# Altium PCB TR8253-EVB-PDI-1_0.PcbDoc
Units mm, origin at the board's own origin, x right, y up, seen from the top; angles counter-clockwise.
Board outline 60 x 60 mm, 4 copper layers (Top Layer, GND, POW, Bottom Layer), stack 1.58 mm thick; 103 components, 107 nets, 394 pads, 293 vias.
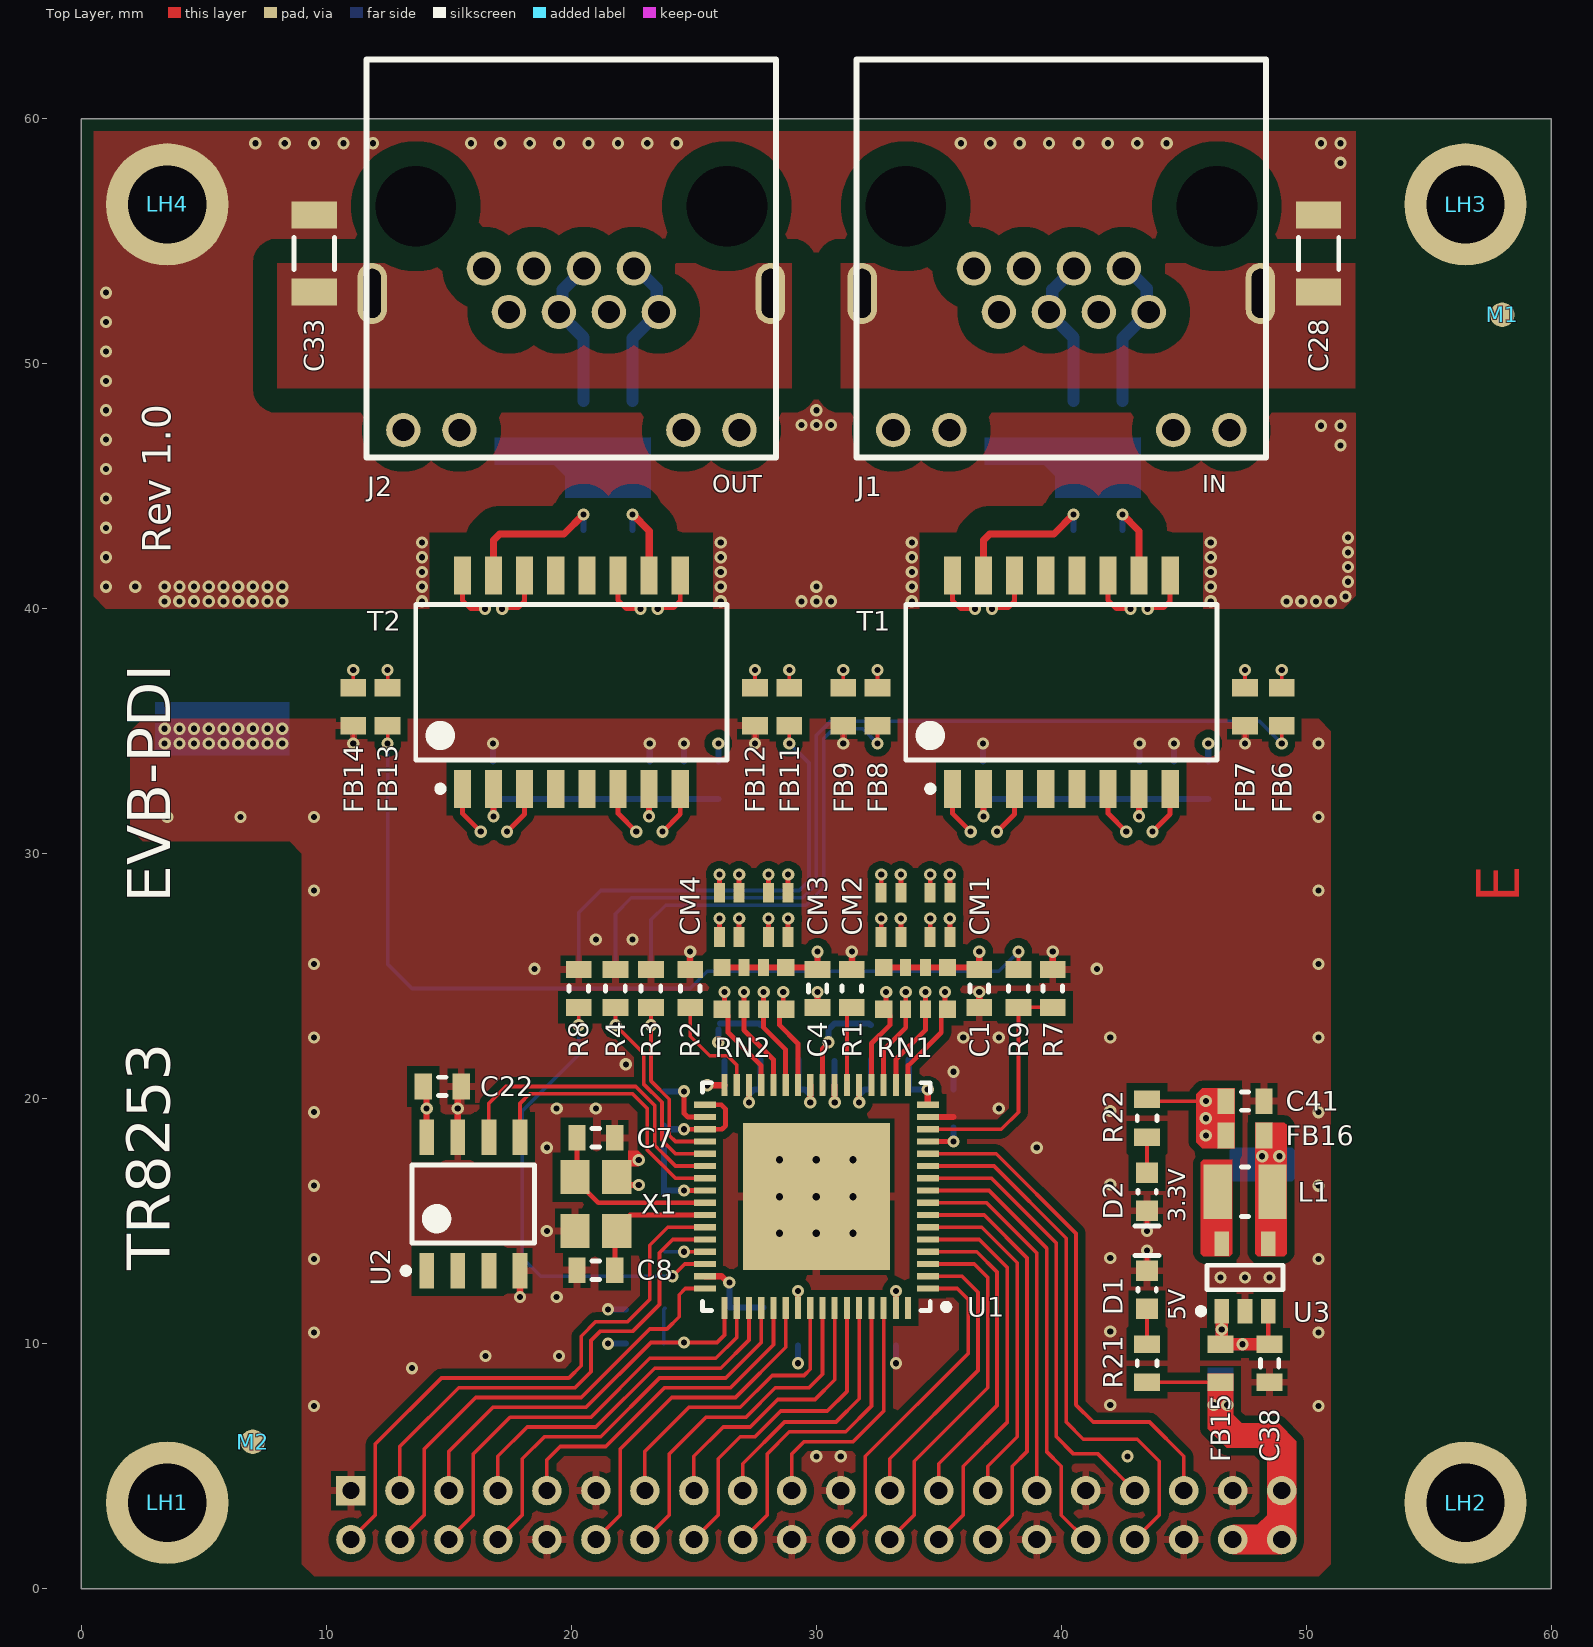
[diagram p0: Top Layer view]
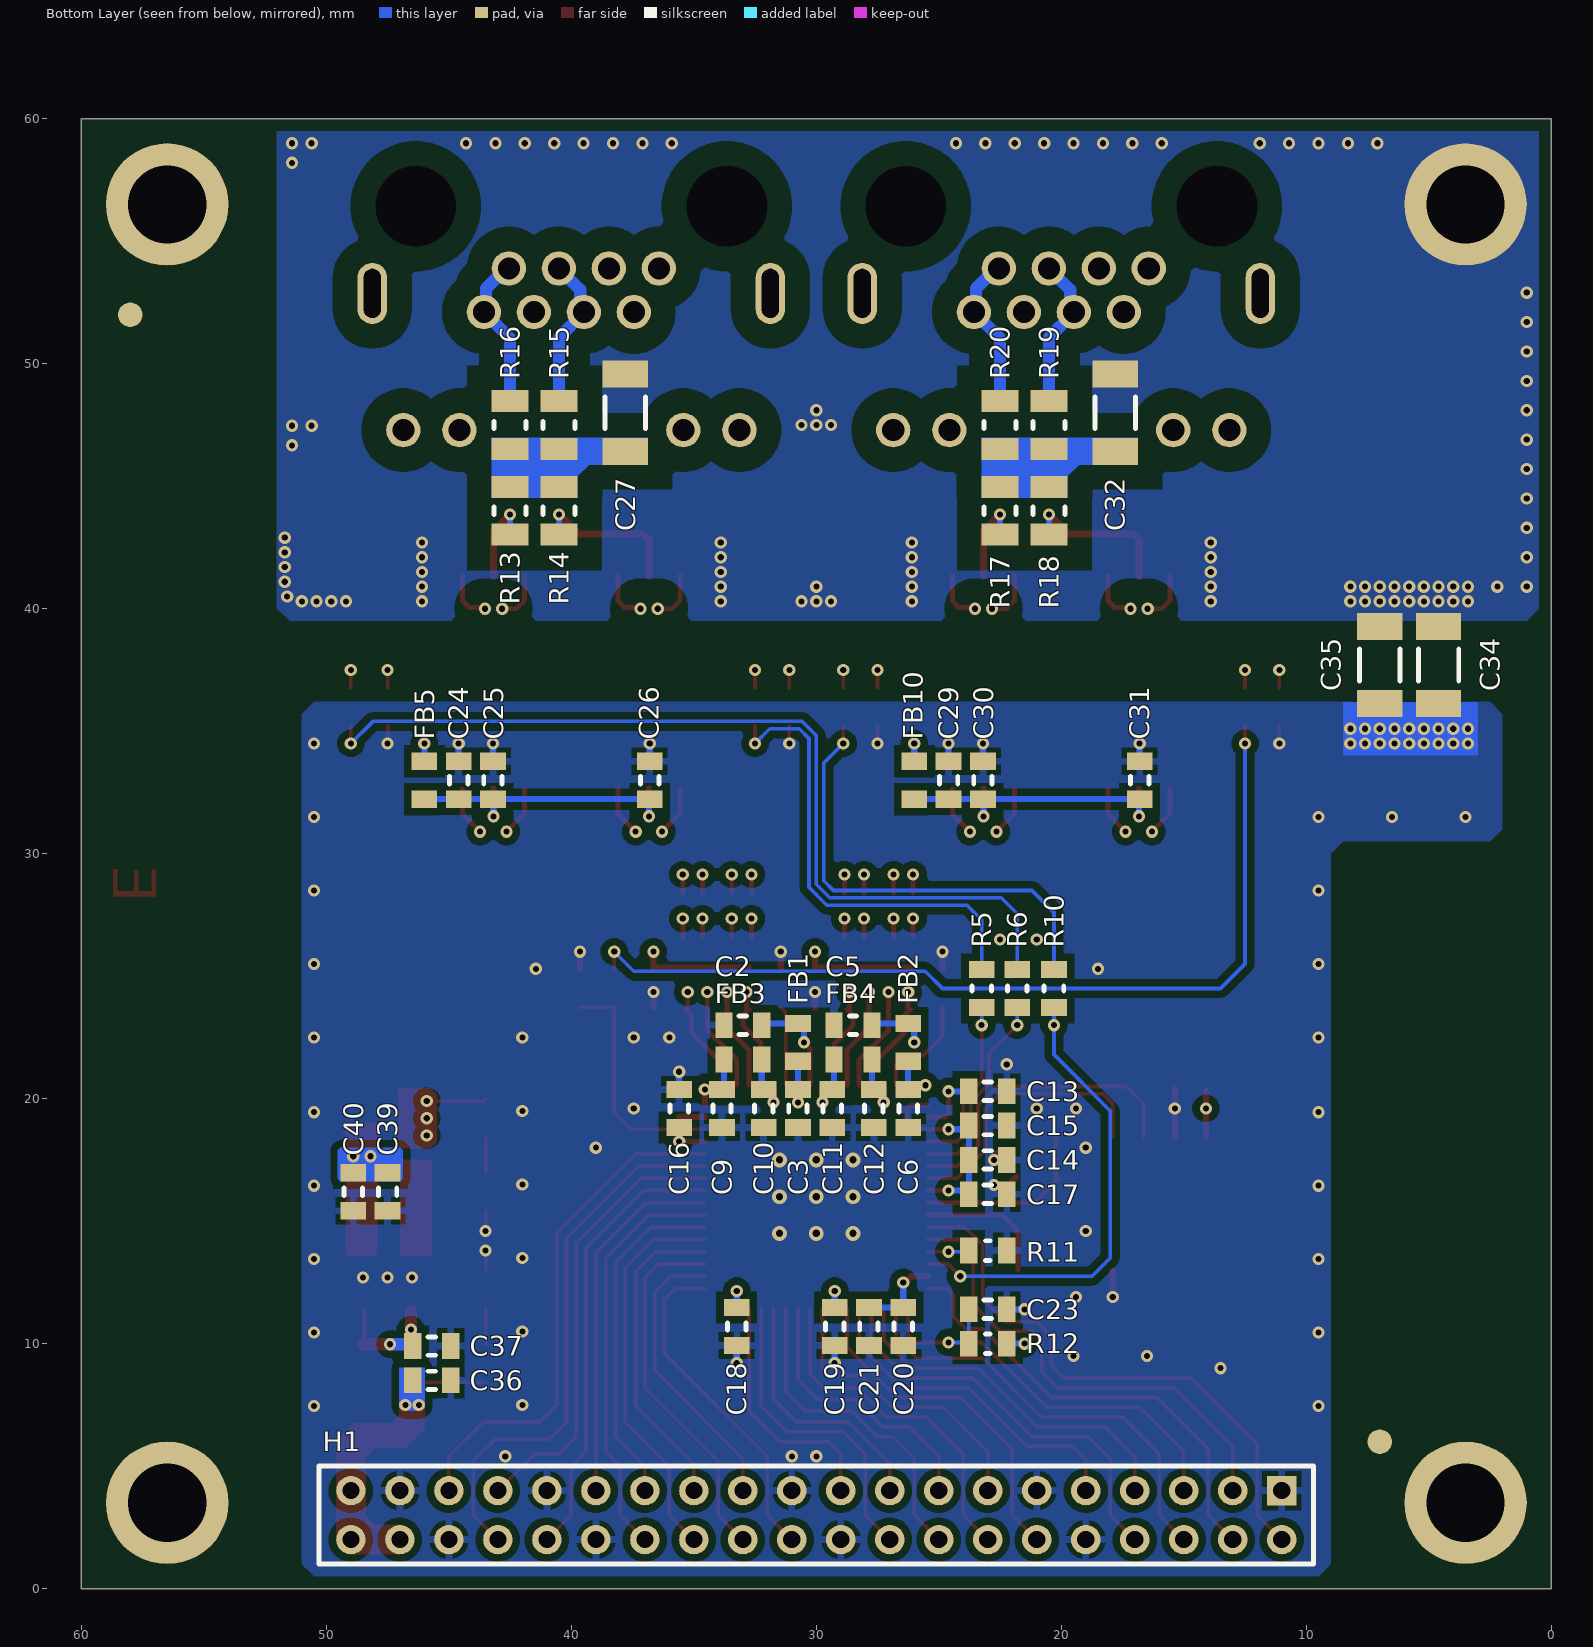
[diagram p1: Bottom Layer view, seen from below]
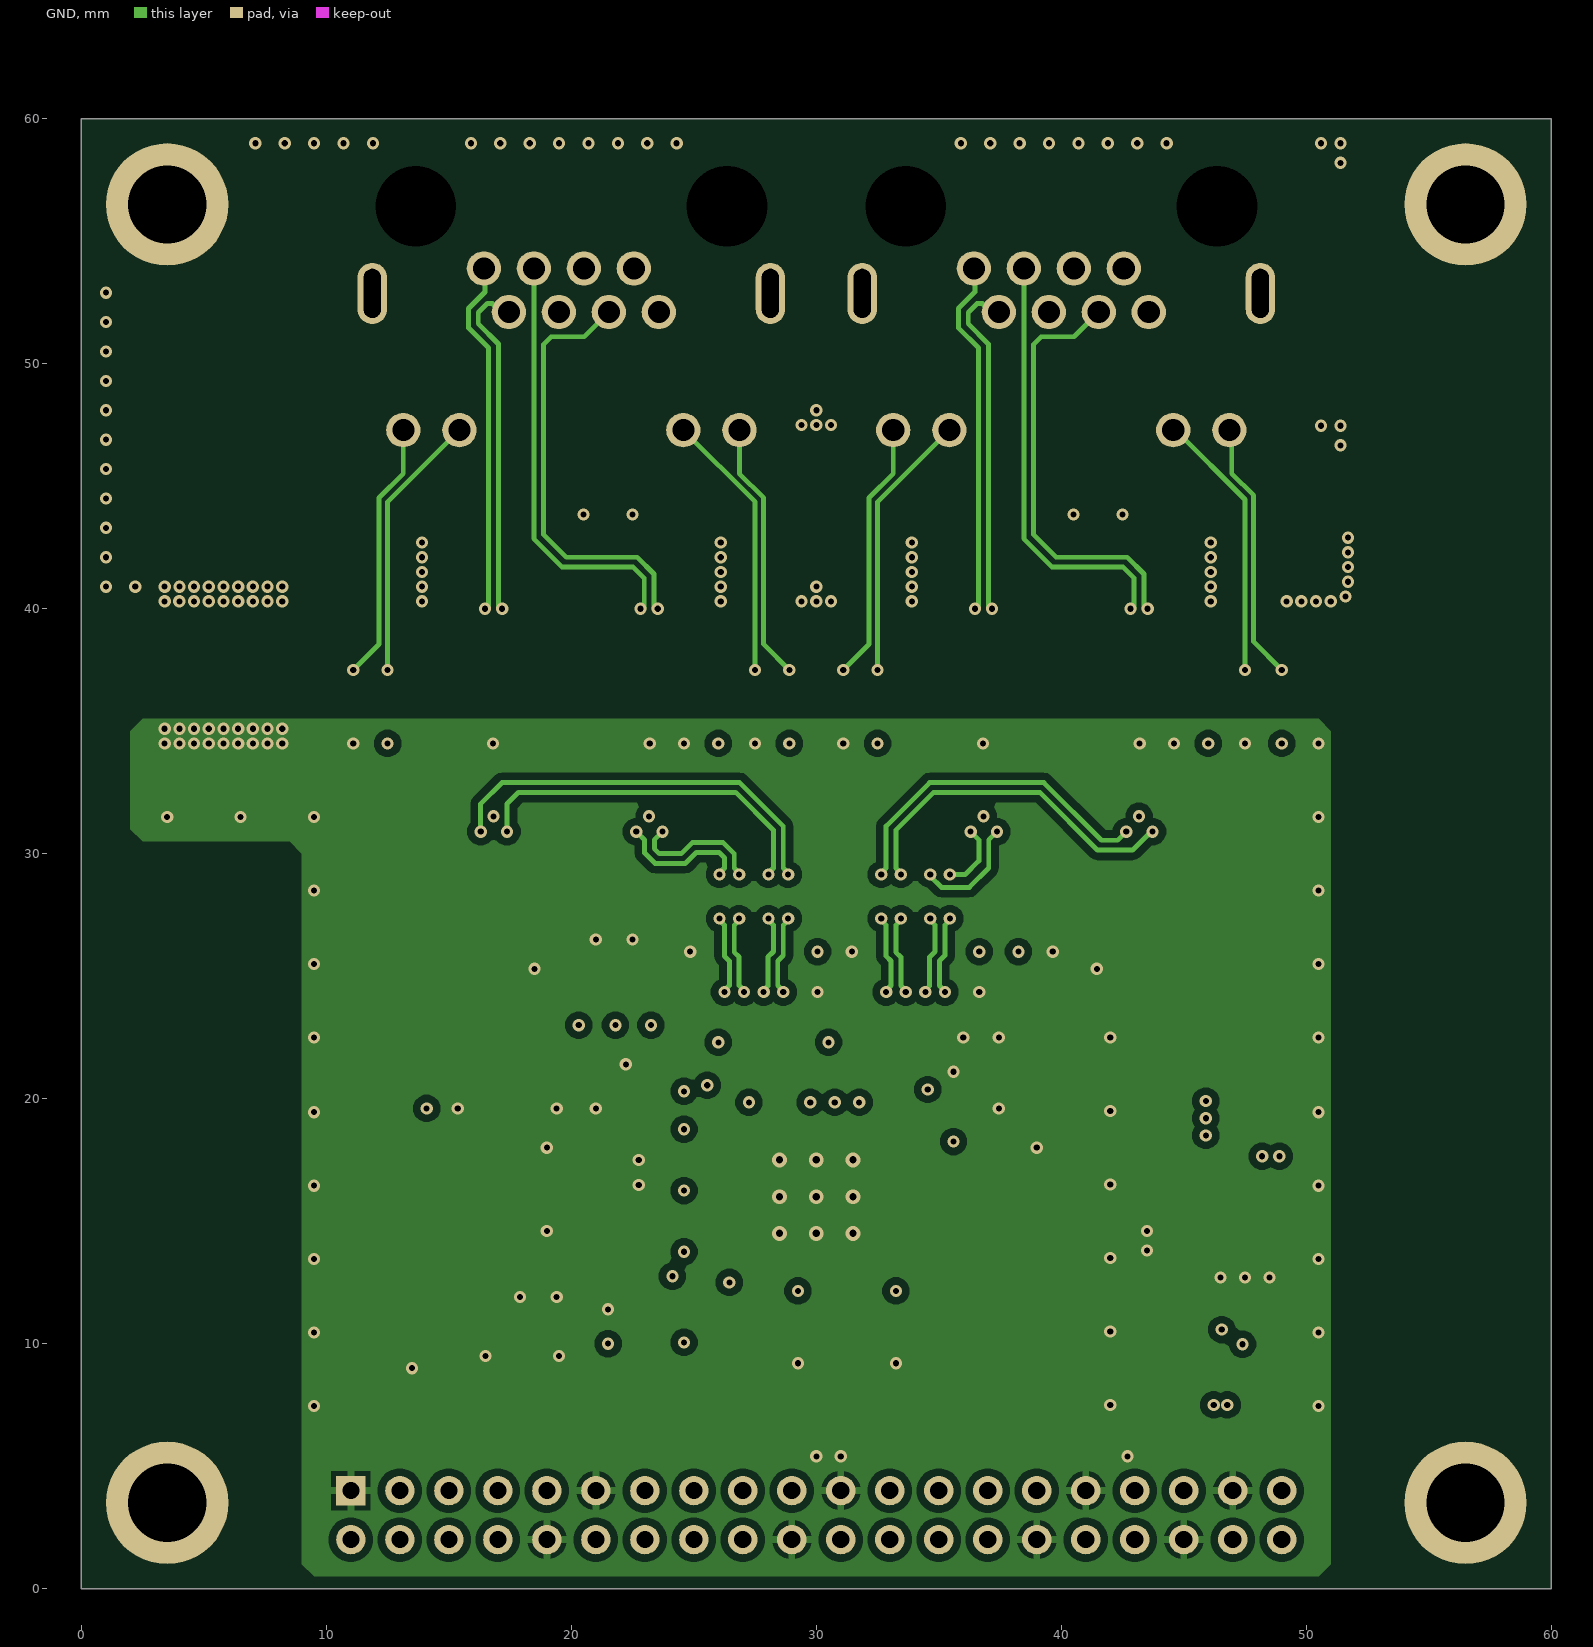
[diagram p2: GND]
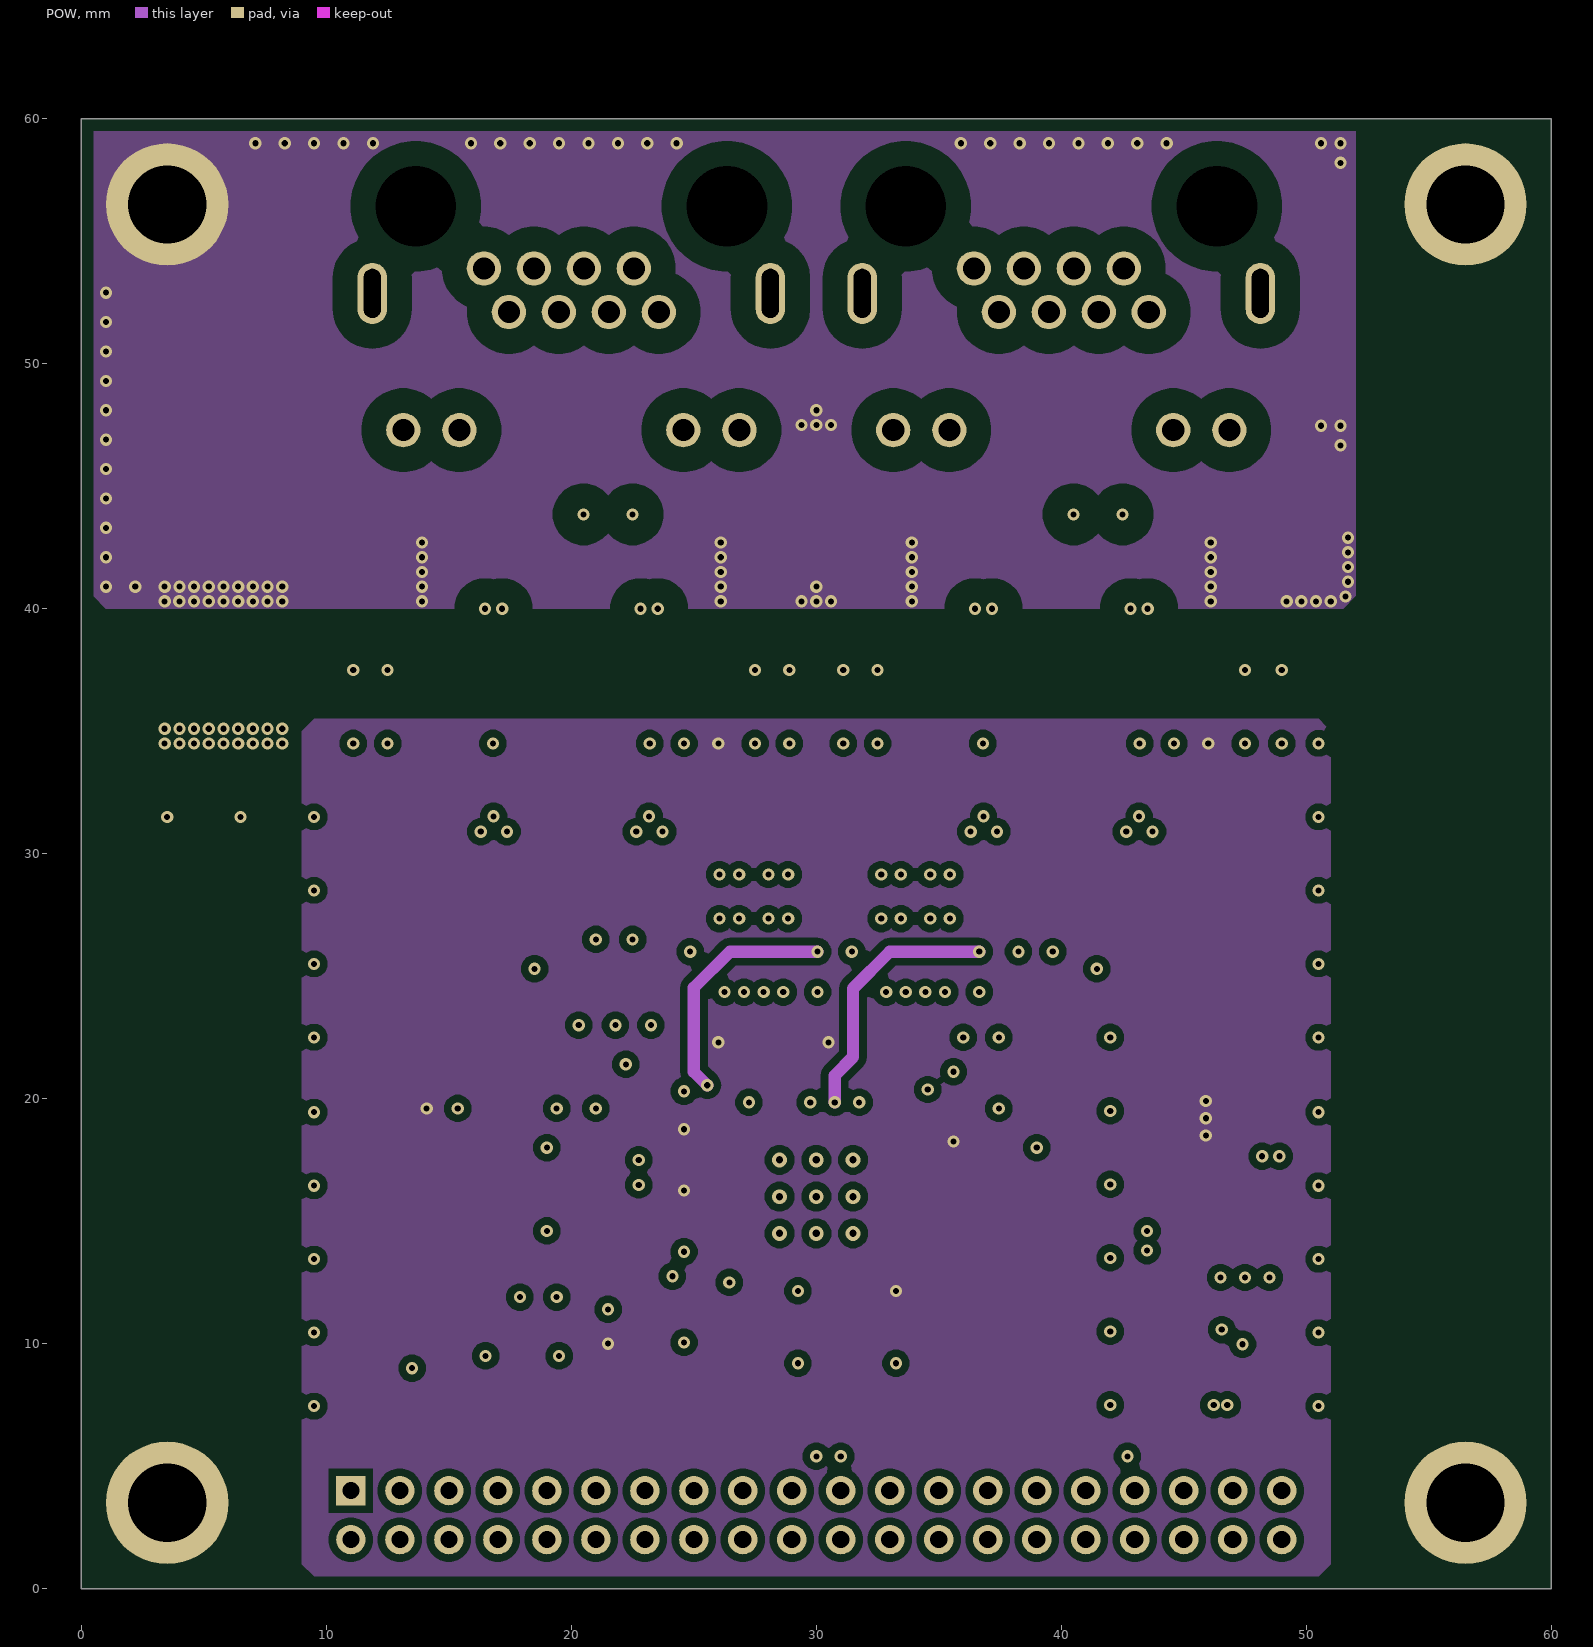
[diagram p3: POW]
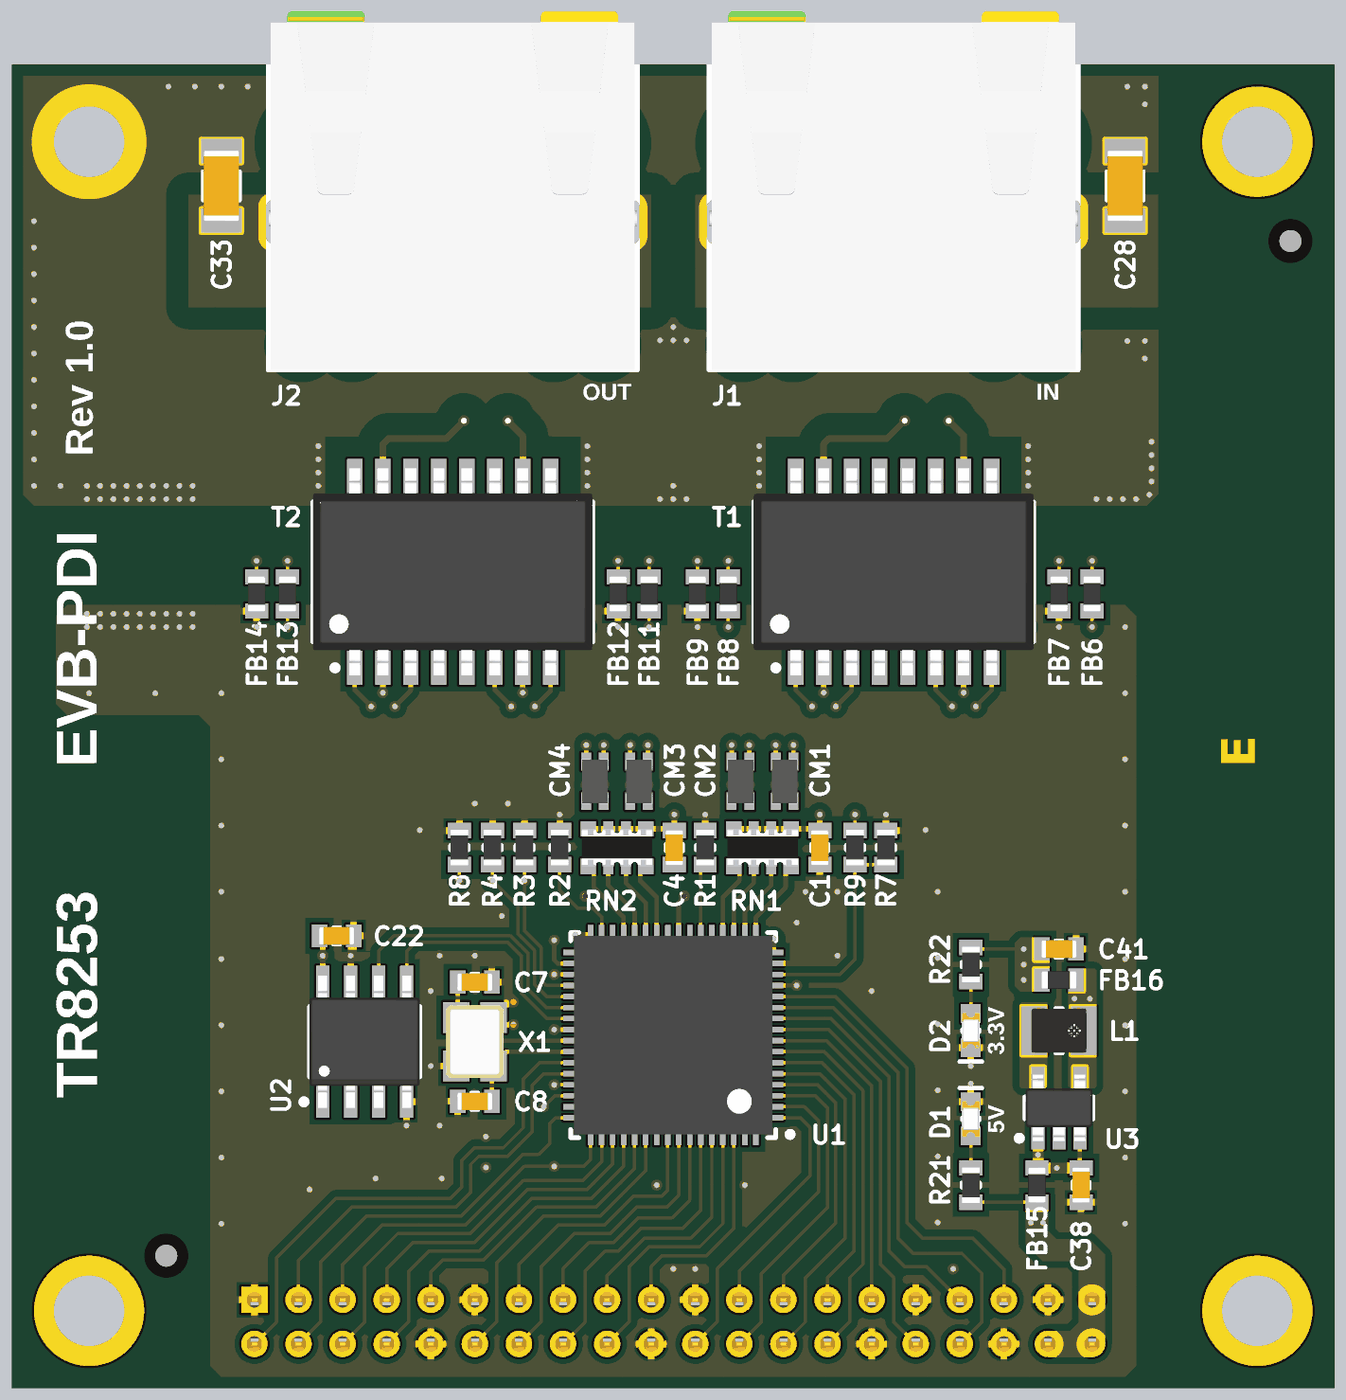
[diagram p4: 3D render of the assembled board from above, using the file's embedded part models]
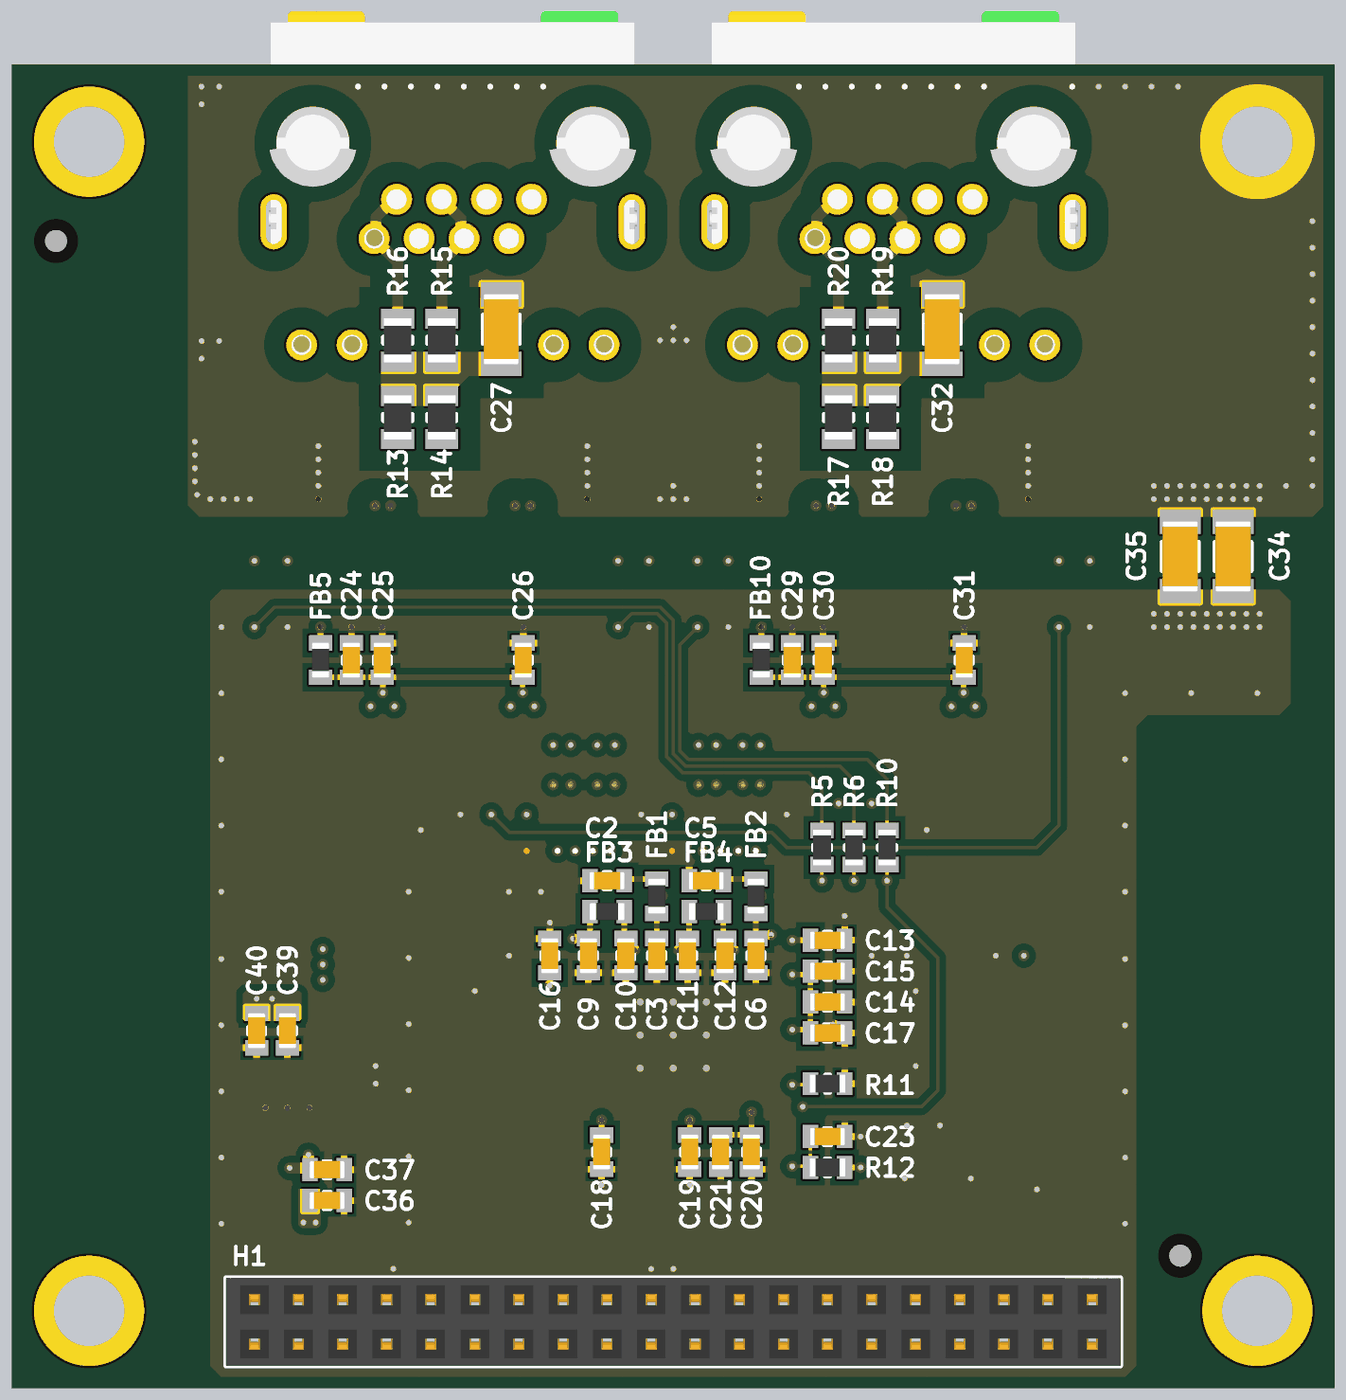
[diagram p5: 3D render of the assembled board from below, using the file's embedded part models]

## Layer stack, top to bottom
Top Solder: solder mask 0.01, Solder Resist, Dk 3.5
Top Layer: signal copper 0.035
Dielectric 1: prepreg 0.1, PP-006, Dk 4.1
GND: signal copper 0.035
Dielectric 3: core 1.24, FR-4, Dk 4.2
POW: signal copper 0.035
Dielectric 2: prepreg 0.1, PP-006, Dk 4.1
Bottom Layer: signal copper 0.035
Bottom Solder: solder mask 0.01, Solder Resist, Dk 3.5

## Board outline
0,0 0,60 60,60 60,0

## Design rules (kind name [scope] priority, off if disabled: settings)
BoardOutlineClearance [(OnLayer('Bottom Layer') OR OnLayer('POW') OR OnLayer('GND') OR OnLayer('Top Layer'))] p1: gap=0.406 ignorepadtopadclearanceinfootprint=FALSE
Clearance PE [InNet('PE') or InNet('S0') or InNet('S1')] p1: gap=1 ignorepadtopadclearanceinfootprint=FALSE
Clearance "Polygon DIFF" [InPolygon vs IsDifferentialPair] p2: gap=0.5 ignorepadtopadclearanceinfootprint=FALSE
Clearance DIFF [IsDifferentialPair] p3: gap=0.2 ignorepadtopadclearanceinfootprint=FALSE
Clearance Polygon [InPolygon] p4: gap=0.3 ignorepadtopadclearanceinfootprint=FALSE
Clearance [All] p5: gap=0.15 ignorepadtopadclearanceinfootprint=TRUE
ComponentClearance [All] p1: gap=0 collisioncheckmode=3 verticalgap=0 showdistances=TRUE
DiffPairsRouting [All] p1: maxlimit=0.2 minlimit=0.2 mostfreqgap=0.2 toplayer_minwidth=0.2 toplayer_maxwidth=0.2 toplayer_prefwidth=0.2 midlayer1_minwidth=0.2 midlayer1_maxwidth=0.2 midlayer1_prefwidth=0.2 midlayer2_minwidth=0.2 midlayer2_maxwidth=0.2 midlayer2_prefwidth=0.2 bottomlayer_minwidth=0.2 bottomlayer_maxwidth=0.2 bottomlayer_prefwidth=0.2 maxuncoupledlength=20
Height [All] p1: minheight=0 maxheight=300 prefheight=12.7
HoleSize [All] p1: absolutevalues=TRUE maxlimit=6.223 minlimit=0.203 maxpercent=80.000 minpercent=20.000
MinimumSolderMaskSliver [All] p1: minsoldermaskwidth=0
PlaneConnect [All] p1: planeconnectstyle=Relief reliefexpansion=0.254 reliefentries=4 reliefconductorwidth=0.254 reliefairgap=0.305
PolygonConnect Via [Isvia] p1: connectstyle=Direct reliefconductorwidth=0.254 reliefentries=4 polygonreliefangle="90 Angle" airgapwidth=0.254
PolygonConnect Power2 [InNet('No Net')] p2: thpad.connectstyle=Direct thpad.reliefconductorwidth=0.381 thpad.reliefentries=4 thpad.polygonreliefangle="90 Angle" thpad.airgapwidth=0.305 smdpad.connectstyle=Relief smdpad.reliefconductorwidth=0.381 smdpad.reliefentries=4 smdpad.polygonreliefangle="90 Angle" smdpad.airgapwidth=0.305 via.connectstyle=Relief via.reliefconductorwidth=0.381 via.reliefentries=4 via.polygonreliefangle="90 Angle" via.airgapwidth=0.305
PolygonConnect Direct [InNet('PE') or InNet('S0') or InNet('S1')] p3: connectstyle=Direct reliefconductorwidth=0.254 reliefentries=4 polygonreliefangle="90 Angle" airgapwidth=0.254
PolygonConnect [All] p4: thpad.connectstyle=Relief thpad.reliefconductorwidth=0.3 thpad.reliefentries=4 thpad.polygonreliefangle="90 Angle" thpad.airgapwidth=0.2 smdpad.connectstyle=Relief smdpad.reliefconductorwidth=0.3 smdpad.reliefentries=4 smdpad.polygonreliefangle="90 Angle" smdpad.airgapwidth=0.2 via.connectstyle=Direct via.reliefconductorwidth=0.254 via.reliefentries=4 via.polygonreliefangle="90 Angle" via.airgapwidth=0.305
RoutingVias [All] p1: holewidth=0.254 width=0.508 viastyle="Through Hole" minholewidth=0.203 minwidth=0.457 maxholewidth=6.3 maxwidth=6.3
SilkToSilkClearance [All] p1: silktosilkclearance=0
SilkToSolderMaskClearance [IsPad] p1: minsilkscreentomaskgap=0 clearancetoexposedcopper=TRUE
SolderMaskExpansion [All] p1: expansion=0.102 istentingtop=FALSE
Width [All] p1: maxlimit=5 minlimit=0.15 preferedwidth=0.15
22 further rules are at their usual default settings.

## Classes and differential pairs
component class SCH-TR8253_config: C22 C23 R3 R4 R5 R6 R7 R8 R9 R10 R11 R12 U2
component class SCH-EC_PORT: C24 C25 C26 C27 C28 C29 C30 C31 C32 C33 C34 C35 CM1 CM2 CM3 CM4 FB5 FB6 FB7 FB8 FB9 FB10 FB11 FB12 FB13 FB14 J1 J2 R13 R14 R15 R16 R17 R18 R19 R20 T1 T2
component class SCH-Connector: H1 LH1 LH2 LH3 LH4 M1 M2
component class SCH-TR8253: C1 C2 C3 C4 C5 C6 C7 C8 C9 C10 C11 C12 C13 C14 C15 C16 C17 C18 C19 C20 C21 FB1 FB2 FB3 FB4 R1 R2 RN1 RN2 U1 X1
component class SCH-POWER: C36 C37 C38 C39 C40 C41 D1 D2 FB15 FB16 L1 R21 R22 U3
differential pair T1: +T1_P -T1_N
differential pair T0: +T0_P -T0_N
differential pair R1: +R1_P -R1_N
differential pair R0: +R0_P -R0_N
differential pair TX_1: +TX_1_P -TX_1_N
differential pair TX_0: +TX_0_P -TX_0_N
differential pair RX_1: +RX_1_P -RX_1_N
differential pair RX_0: +RX_0_P -RX_0_N
differential pair TX1: +TX1_P -TX1_N
differential pair TX0: +TX0_P -TX0_N
differential pair RX1: +RX1_P -RX1_N
differential pair RX0: +RX0_P -RX0_N

## Components (designator, comment, footprint, x,y, rotation, side; value= is the part's Value field where it differs from the comment)
C1 "100nF 0603" "CAPC1608X08 (0603)" 36.65,24.5 r90 top
C2 "10uF 16V 0603" "CAPC1608X08 (0603)" 33,23 r0 bottom
C3 "100nF 0603" "CAPC1608X08 (0603)" 30.75,19.6 r270 bottom
C4 "100nF 0603" "CAPC1608X08 (0603)" 30.05,24.5 r90 top
C5 "10uF 16V 0603" "CAPC1608X08 (0603)" 28.5,23 r0 bottom
C6 "100nF 0603" "CAPC1608X08 (0603)" 26.25,19.6 r270 bottom
C7 "18pF 0603" "CAPC1608X08 (0603)" 21,18.4 r0 top
C8 "18pF 0603" "CAPC1608X08 (0603)" 21,13 r180 top
C9 "2.2uF 25V 0603" "CAPC1608X08 (0603)" 33.85,19.6 r270 bottom
C10 "100nF 0603" "CAPC1608X08 (0603)" 32.15,19.6 r270 bottom
C11 "2.2uF 25V 0603" "CAPC1608X08 (0603)" 29.35,19.6 r270 bottom
C12 "100nF 0603" "CAPC1608X08 (0603)" 27.65,19.6 r270 bottom
C13 "100nF 0603" "CAPC1608X08 (0603)" 23,20.3 r180 bottom
C14 "10uF 16V 0603" "CAPC1608X08 (0603)" 23,17.5 r0 bottom
C15 "100nF 0603" "CAPC1608X08 (0603)" 23,18.9 r0 bottom
C16 "100nF 0603" "CAPC1608X08 (0603)" 35.6,19.6 r270 bottom
C17 "100nF 0603" "CAPC1608X08 (0603)" 23,16.1 r0 bottom
C18 "100nF 0603" "CAPC1608X08 (0603)" 33.25,10.7 r90 bottom
C19 "100nF 0603" "CAPC1608X08 (0603)" 29.25,10.7 r270 bottom
C20 "100nF 0603" "CAPC1608X08 (0603)" 26.45,10.7 r270 bottom
C21 "10uF 16V 0603" "CAPC1608X08 (0603)" 27.85,10.7 r270 bottom
C22 "100nF 0603" "CAPC1608X08 (0603)" 14.73,20.5 r0 top
C23 "100nF 0603" "CAPC1608X08 (0603)" 23,11.4 r180 bottom
C24 "100nF 0603" "CAPC1608X08 (0603)" 44.6,33 r90 bottom
C25 "100nF 0603" "CAPC1608X08 (0603)" 43.2,33 r90 bottom
C26 "100nF 0603" "CAPC1608X08 (0603)" 36.8,33 r90 bottom
C27 "1nF 2kV 1206" "CAPC3216X16 (1206)" 37.8,48 r90 bottom
C28 "1nF 2kV 1206" "CAPC3216X16 (1206)" 50.5,54.5 r90 top
C29 "100nF 0603" "CAPC1608X08 (0603)" 24.6,33 r90 bottom
C30 "100nF 0603" "CAPC1608X08 (0603)" 23.2,33 r90 bottom
C31 "100nF 0603" "CAPC1608X08 (0603)" 16.8,33 r90 bottom
C32 "1nF 2kV 1206" "CAPC3216X16 (1206)" 17.8,48 r90 bottom
C33 "1nF 2kV 1206" "CAPC3216X16 (1206)" 9.5,54.5 r90 top
C34 "1nF 2kV 1206" "CAPC3216X16 (1206)" 4.6,37.7 r90 bottom
C35 "1nF 2kV 1206" "CAPC3216X16 (1206)" 7,37.7 r90 bottom
C36 "10uF 16V 0603" "CAPC1608X08 (0603)" 45.7,8.5 r180 bottom
C37 "10uF 16V 0603" "CAPC1608X08 (0603)" 45.7,9.9 r180 bottom
C38 "100nF 0603" "CAPC1608X08 (0603)" 48.5,9.2 r270 top
C39 "100nF 0603" "CAPC1608X08 (0603)" 47.5,16.2 r270 bottom
C40 "10uF 16V 0603" "CAPC1608X08 (0603)" 48.9,16.2 r270 bottom
C41 "10uF 16V 0603" "CAPC1608X08 (0603)" 47.5,19.9 r0 top
CM1 "90Ω 2012" CAF-80P120X200-4N 35.05,27.5 r90 top
CM2 "90Ω 2012" CAF-80P120X200-4N 33.05,27.5 r90 top
CM3 "90Ω 2012" CAF-80P120X200-4N 28.45,27.5 r90 top
CM4 "90Ω 2012" CAF-80P120X200-4N 26.45,27.5 r90 top
D1 "GR/0603" DIOC1608X06N-(0603) 43.5,12.2 r270 top
D2 "GR/0603" DIOC1608X06N-(0603) 43.5,16.2 r90 top
FB1 "120Ω 2A 0603" "INDC1608X08 (0603)" 30.75,22.3 r90 bottom
FB2 "120Ω 2A 0603" "INDC1608X08 (0603)" 26.25,22.3 r90 bottom
FB3 "120Ω 2A 0603" "INDC1608X08 (0603)" 33,21.6 r180 bottom
FB4 "120Ω 2A 0603" "INDC1608X08 (0603)" 28.5,21.6 r180 bottom
FB5 "120Ω 2A 0603" "INDC1608X08 (0603)" 46,33 r270 bottom
FB6 "120Ω 2A 0603" "INDC1608X08 (0603)" 49,36 r270 top
FB7 "120Ω 2A 0603" "INDC1608X08 (0603)" 47.5,36 r270 top
FB8 "120Ω 2A 0603" "INDC1608X08 (0603)" 32.5,36 r270 top
FB9 "120Ω 2A 0603" "INDC1608X08 (0603)" 31.1,36 r270 top
FB10 "120Ω 2A 0603" "INDC1608X08 (0603)" 26,33 r270 bottom
FB11 "120Ω 2A 0603" "INDC1608X08 (0603)" 28.9,36 r270 top
FB12 "120Ω 2A 0603" "INDC1608X08 (0603)" 27.5,36 r270 top
FB13 "120Ω 2A 0603" "INDC1608X08 (0603)" 12.5,36 r270 top
FB14 "120Ω 2A 0603" "INDC1608X08 (0603)" 11.1,36 r270 top
FB15 "120Ω 2A 0603" "INDC1608X08 (0603)" 46.5,9.2 r90 top
FB16 "120Ω 2A 0603" "INDC1608X08 (0603)" 47.5,18.5 r180 top
H1 "直插双排母2.4/4.3" "2.00 mm 直插双排母2.4/4.3 2X20P" 30,3 r270 bottom
J1 "1901-396X" 1901-396X 40,53 r180 top
J2 "1901-396X" 1901-396X 20,53 r180 top
L1 "3.3uH 1.2A 2520" INDC2520X10N-(2520) 47.5,16.2 r0 top
LH1 "DPDT/24V/250VAC/30A" LOCAL-HOLE-M3/5 3.5,3.5 r0 top
LH2 "DPDT/24V/250VAC/30A" LOCAL-HOLE-M3/5 56.5,3.5 r0 top
LH3 "DPDT/24V/250VAC/30A" LOCAL-HOLE-M3/5 56.5,56.5 r0 top
LH4 "DPDT/24V/250VAC/30A" LOCAL-HOLE-M3/5 3.5,56.5 r0 top
M1 "MARK POINT" MARK-POINT-1mm/2mm 58,52 r90 top
M2 "MARK POINT" MARK-POINT-1mm/2mm 7,6 r90 top
R1 "12K 0603" "RESC1608X04 (0603)" 31.45,24.5 r270 top
R2 "12K 0603" "RESC1608X04 (0603)" 24.85,24.5 r90 top
R3 "4.7K 0603" "RESC1608X04 (0603)" 23.25,24.5 r270 top
R4 "4.7K 0603" "RESC1608X04 (0603)" 21.8,24.5 r270 top
R5 "470Ω 0603" "RESC1608X04 (0603)" 23.25,24.5 r270 bottom
R6 "470Ω 0603" "RESC1608X04 (0603)" 21.8,24.5 r270 bottom
R7 "4.7K 0603" "RESC1608X04 (0603)" 39.65,24.5 r270 top
R8 "4.7K 0603" "RESC1608X04 (0603)" 20.3,24.5 r270 top
R9 "470Ω 0603" "RESC1608X04 (0603)" 38.25,24.5 r270 top
R10 "470Ω 0603" "RESC1608X04 (0603)" 20.3,24.5 r270 bottom
R11 "4.7K 0603" "RESC1608X04 (0603)" 23,13.8 r0 bottom
R12 "4.7K 0603" "RESC1608X04 (0603)" 23,10 r0 bottom
R13 "75Ω 0805" "RESC2012X05 (0805)" 42.5,44 r270 bottom
R14 "75Ω 0805" "RESC2012X05 (0805)" 40.5,44 r270 bottom
R15 "75Ω 0805" "RESC2012X05 (0805)" 40.5,47.5 r90 bottom
R16 "75Ω 0805" "RESC2012X05 (0805)" 42.5,47.5 r90 bottom
R17 "75Ω 0805" "RESC2012X05 (0805)" 22.5,44 r270 bottom
R18 "75Ω 0805" "RESC2012X05 (0805)" 20.5,44 r270 bottom
R19 "75Ω 0805" "RESC2012X05 (0805)" 20.5,47.5 r90 bottom
R20 "75Ω 0805" "RESC2012X05 (0805)" 22.5,47.5 r90 bottom
R21 "1K 0603" "RESC1608X04 (0603)" 43.5,9.2 r270 top
R22 "470Ω 0603" "RESC1608X04 (0603)" 43.5,19.2 r90 top
RN1 "49.9Ω*4 1206" "CAC-80P320X160-8 (1206)" 34.05,24.5 r0 top
RN2 "49.9Ω*4 1206" "CAC-80P320X160-8 (1206)" 27.45,24.5 r0 top
T1 "H1601CE" SOIC127P940X640-16N 40,37 r90 top
T2 "H1601CE" SOIC127P940X640-16N 20,37 r90 top
U1 "TR8253" QFN50P900X900X100_HS-65M 30,16 r90 top
U2 "M24C16-WMN6TP" SOIC127P600X175-8N 16,15.7 r0 top
U3 "ME3101A33M5G" SOT95P280X145-5N 47.5,12.7 r0 top
X1 "25M 3225" SON220P250X80-4N-(3225) 21,15.7 r270 top

## Footprints (in the part's own frame and the unit in brackets; to place one, negate y for a bottom-side part, rotate by r counter-clockwise, add the part's x,y. Pads: shape width x height; smd on the part's side, far side on the other; paste and mask are expansions set on the pad)
"2.00 mm 直插双排母2.4/4.3 2X20P" [mm]
  rect 1.2x1.2 hole 0.7: 1(-1,19)
  round 1.2 hole 0.7: 2(1,19) 3(-1,17) 4(1,17) 5(-1,15) 6(1,15) 7(-1,13) 8(1,13) 9(-1,11) 10(1,11) 11(-1,9) 12(1,9) 13(-1,7) 14(1,7) 15(-1,5) 16(1,5) 17(-1,3) 18(1,3) 19(-1,1) 20(1,1) 21(-1,-1) 22(1,-1) 23(-1,-3) 24(1,-3) 25(-1,-5) 26(1,-5) 27(-1,-7) 28(1,-7) 29(-1,-9) 30(1,-9) 31(-1,-11) 32(1,-11) 33(-1,-13) 34(1,-13) 35(-1,-15) 36(1,-15) 37(-1,-17) 38(1,-17) 39(-1,-19) 40(1,-19)
  silkscreen extent -2,-20.3 2,20.3, body extent -2,-20.3 2,20.3, height 4.35
1901-396X [mm]
  round 1.4 hole 0.9: 1(3.57,-0.89) 2(2.55,0.89) 3(1.53,-0.89) 4(0.51,0.89) 5(-0.51,-0.89) 6(-1.53,0.89) 7(-2.55,-0.89) 8(-3.57,0.89) 9(-6.86,5.71) 10(-4.57,5.71) 11(4.57,5.71) 12(6.86,5.71)
  oval 1.2x2.5 hole 0.7 slot 2 at 90 deg: 13(-8.125,0.13) 14(8.125,0.13)
  round 0 hole 3.3: ""(-6.35,-3.43) ""(6.35,-3.43)
  silkscreen extent -8.35,-9.42 8.36,6.83, body extent -8.35,-9.42 8.36,6.83, height 14.75
"CAC-80P320X160-8 (1206)" [mm] "Chip Array, ConvexS, 8-Leads, Pitch 0.80mm,  Body 3.20x1.60mm,  IPC Medium Density"
  rect 0.7x0.7 smd: 1(-1.3,-0.85) 4(1.3,-0.85) 5(1.3,0.85) 8(-1.3,0.85)
  rect 0.45x0.7 smd: 2(-0.4,-0.85) 3(0.4,-0.85) 6(0.4,0.85) 7(-0.4,0.85)
  body extent -1.6,-0.85 1.6,0.85, height 0.6
CAF-80P120X200-4N [mm] "Chip Array, Flat, 4-Leads, Pitch 0.80mm,  Body 1.20x2.00mm,  IPC Medium Density"
  rect 0.8x0.45 smd: 1(-0.9,0.4) 2(-0.9,-0.4) 3(0.9,-0.4) 4(0.9,0.4)
  body extent -1,-0.6 1,0.6, height 1.2
"CAPC1608X08 (0603)" [mm] "Chip Capacitor, 2-Leads, Body 1.60x0.80mm, IPC Medium Density"
  rect 0.7x1.05 smd: 1(-0.775,0) 2(0.775,0)
  silkscreen extent -0.15,-0.38 0.15,0.38, body extent -0.8,-0.4 0.8,0.4, height 0.8
"CAPC3216X16 (1206)" [mm] "Chip Capacitor, 2-Leads, Body 3.20x1.60mm, IPC Medium Density"
  rect 1.1x1.85 smd: 1(-1.575,0) 2(1.575,0)
  silkscreen extent -0.65,-0.82 0.65,0.82, body extent -1.6,-0.8 1.6,0.8, height 1.6
DIOC1608X06N-(0603) [mm] "Chip Diode, 2-Leads, Body 1.60x0.80mm, IPC Medium Density"
  rect 0.85x0.9 smd: 1(-0.775,0) 2(0.775,0)
  silkscreen extent -1.4,-0.5 0.05,0.5, body extent -0.8,-0.4 0.8,0.4, height 0.6
"INDC1608X08 (0603)" [mm] "Chip Inductor, 2-Leads, Body 1.60x0.80mm, IPC Medium Density"
  rect 0.7x1.05 smd: 1(-0.775,0) 2(0.775,0)
  body extent -0.8,-0.4 0.8,0.4, height 0.8
INDC2520X10N-(2520) [mm] "Chip Inductor, 2-Leads, Body 2.50x2.00mm, IPC Medium Density"
  rect 1.16x2.22 smd: 1(-1.12,0) 2(1.12,0)
  silkscreen extent -0.15,-1.01 0.15,1.01, body extent -1.26,-1.01 1.26,1.06, height 1.2
LOCAL-HOLE-M3/5 [mm]
  round 5 hole 3.2: 0(0,0)
MARK-POINT-1mm/2mm [mm]
  round 1 smd mask+0.102: 0(0,0)
  round 1 smd far side mask+0.102: 0(0,0)
  round 2 on Top Solder: 0(0,0)
  round 2 on Bottom Solder: 0(0,0)
QFN50P900X900X100_HS-65M [mm] "QFN, 64-Leads, Body 9.00x9.00mm, Pitch 0.50mm, Thermal Pad 6.00x6.00mm, IPC Low Density"
  rect 0.25x0.9 smd: 1(-3.75,-4.55) 2(-3.25,-4.55) 3(-2.75,-4.55) 4(-2.25,-4.55) 5(-1.75,-4.55) 6(-1.25,-4.55) 7(-0.75,-4.55) 8(-0.25,-4.55) 9(0.25,-4.55) 10(0.75,-4.55) 11(1.25,-4.55) 12(1.75,-4.55) 13(2.25,-4.55) 14(2.75,-4.55) 15(3.25,-4.55) 16(3.75,-4.55) 33(3.75,4.55) 34(3.25,4.55) 35(2.75,4.55) 36(2.25,4.55) 37(1.75,4.55) 38(1.25,4.55) 39(0.75,4.55) 40(0.25,4.55) 41(-0.25,4.55) 42(-0.75,4.55) 43(-1.25,4.55) 44(-1.75,4.55) 45(-2.25,4.55) 46(-2.75,4.55) 47(-3.25,4.55) 48(-3.75,4.55)
  rect 0.9x0.25 smd: 17(4.55,-3.75) 18(4.55,-3.25) 19(4.55,-2.75) 20(4.55,-2.25) 21(4.55,-1.75) 22(4.55,-1.25) 23(4.55,-0.75) 24(4.55,-0.25) 25(4.55,0.25) 26(4.55,0.75) 27(4.55,1.25) 28(4.55,1.75) 29(4.55,2.25) 30(4.55,2.75) 31(4.55,3.25) 32(4.55,3.75) 49(-4.55,3.75) 50(-4.55,3.25) 51(-4.55,2.75) 52(-4.55,2.25) 53(-4.55,1.75) 54(-4.55,1.25) 55(-4.55,0.75) 56(-4.55,0.25) 57(-4.55,-0.25) 58(-4.55,-0.75) 59(-4.55,-1.25) 60(-4.55,-1.75) 61(-4.55,-2.25) 62(-4.55,-2.75) 63(-4.55,-3.25) 64(-4.55,-3.75)
  rect 6x6 smd: 65(0,0)
  silkscreen extent -4.65,-5.43 4.65,4.65, body extent -4.5,-4.5 4.5,4.5, height 1
"RESC1608X04 (0603)" [mm] "Chip Resistor, 2-Leads, Body 1.60x0.80mm, IPC Medium Density"
  rect 0.7x1.05 smd: 1(-0.775,0) 2(0.775,0)
  silkscreen extent -0.1,-0.4 0.1,0.4, body extent -0.8,-0.4 0.8,0.4, height 0.45
"RESC2012X05 (0805)" [mm] "Chip Resistor, 2-Leads, Body 2.00x1.25mm, IPC Medium Density"
  rect 0.9x1.5 smd: 1(-0.975,0) 2(0.975,0)
  silkscreen extent -0.15,-0.65 0.15,0.65, body extent -1,-0.63 1,0.62, height 0.5
SOIC127P600X175-8N [mm] "SOIC, 8-Leads, Body 4.90x3.90mm, Pitch 1.27mm, IPC Medium Density"
  rect 0.6x1.45 smd: 1(-1.905,-2.725) 2(-0.635,-2.725) 3(0.635,-2.725) 4(1.905,-2.725) 5(1.905,2.725) 6(0.635,2.725) 7(-0.635,2.725) 8(-1.905,2.725)
  silkscreen extent -2.88,-2.85 2.5,1.6, body extent -2.5,-3 2.5,3, height 1.75
SOIC127P940X640-16N [mm] "SOIC, 16-Leads, Body 12.70x7.10mm, Pitch 1.27mm, IPC Medium Density"
  rect 1.55x0.7 smd: 1(-4.35,4.445) 2(-4.35,3.175) 3(-4.35,1.905) 4(-4.35,0.635) 5(-4.35,-0.635) 6(-4.35,-1.905) 7(-4.35,-3.175) 8(-4.35,-4.445) 9(4.35,-4.445) 10(4.35,-3.175) 11(4.35,-1.905) 12(4.35,-0.635) 13(4.35,0.635) 14(4.35,1.905) 15(4.35,3.175) 16(4.35,4.445)
  silkscreen extent -4.47,-6.35 3.18,6.35, body extent -4.7,-6.35 4.7,6.35, height 6.4
SON220P250X80-4N-(3225) [mm] "SON, 4-Leads, Body 3.20x2.50mm, Pitch 2.20mm, IPC Medium Density"
  rect 1.4x1.2 smd: 1(-1.1,-0.85) 2(1.1,-0.85) 3(1.1,0.85) 4(-1.1,0.85)
  body extent -1.65,-1.3 1.65,1.3, height 0.8
SOT95P280X145-5N [mm] "SOT23, 5-Leads, Body 2.90x2.80mm, Pitch 0.95mm, IPC Medium Density"
  rect 0.6x1 smd: 1(-0.95,-1.375) 2(0,-1.375) 3(0.95,-1.375) 4(0.95,1.375) 5(-0.95,1.375)
  silkscreen extent -1.92,-1.5 1.55,0.5, body extent -1.53,-1.5 1.53,1.5, height 1.45

## Part data
C1 C3 C4 C6 C10 C12 C13 C15 C16 C17 C18 C19 C20 C22 C23 C24 C25 C26 C29 C30 C31 C38 C39: "贴片MLCC电容 100nF 50V X7R 10% 0603", 1st Manufacturer=Yageo, 1st PartNumber=CC0603KRX7R9BB104, 2nd Manufacturer=TDK, 2nd PartNumber=CGA3E2X7R1H104K080AA, ERP_ID=12A20039
C2 C5 C14 C21 C36 C37 C40 C41: "贴片MLCC电容 10uF 16V X5R 20% 0603", 1st Manufacturer=YAGEO, 1st PartNumber=CC0603KRX5R7BB106, ERP_ID=12A20110
C7 C8: "贴片MLCC电容 18pF 50V NPO 5% 0603", 1st Manufacturer=Yageo, 1st PartNumber=CC0603JRNPO9BN180, ERP_ID=12A20092
C9 C11: "贴片MLCC电容 2.2uF 25V X5R 10% 0603", 1st Manufacturer=Yageo, 1st PartNumber=CC0603KRX5R8BB225, ERP_ID=12A20113
C27 C28 C32 C33 C34 C35: "贴片MLCC电容 1.0nF 2KV X7R 10% 1206", 1st Manufacturer=Yageo, 1st PartNumber=CC1206KKX7RDBB102, ERP_ID=12A20057
CM1 CM2 CM3 CM4: library part "90Ω@100MHz 2012", "高速信号共模滤波器 90Ω@100MHz, 0.33A, 2012", 1st Manufacturer=顺络, 1st PartNumber=SDCW2012-2-900TF, 2nd Manufacturer=TDK, 2nd PartNumber=ACM2012E-900-2P-T01, ERP_ID=12A40029
D1 D2: "标准LED-SMD Green Clear 569nm", 1st Manufacturer=LiteON, 1st PartNumber=LTST-C190GKT, 2nd Manufacturer=可国产替代, 2nd PartNumber=可国产替代, ERP_ID=14A10005
FB1 FB2 FB3 FB4 FB5 FB6 FB7 FB8 FB9 FB10 FB11 FB12 FB13 FB14 FB15 FB16: library part "120Ω@100MHz 2A 0603", "电源线磁珠 0603 120Ω@100MHz 2A", 1st Manufacturer=顺络, 1st PartNumber=PZ1608U121-2R0TF, 2nd Manufacturer=Murata, 2nd PartNumber=BLM18PG121SN1D, ERP_ID=12A40009
H1: library part HDR2.00mm/2x20/F, "2.00 mm 直插双排母 2.4/4.3 2X20P,2A", 1st Manufacturer=MECT, 1st PartNumber=703-2S-3C-2*20PS-4.3/2.4, 2nd Manufacturer=国产可替代, 2nd PartNumber=国产可替代, ERP_ID=15C50144
J1 J2: "以太网连接器 90度弯 带灯（左黄右绿）金属外壳 EMI弹片", 1st Manufacturer=KINSUN, 2nd Manufacturer=-, 1st PartNumber=1901-396X, 2nd PartNumber=-, ERP_ID=15C80007
L1: "叠片电感 2520 3.3uH 1.2A ±20%", 1st Manufacturer=顺络, 1st PartNumber=MPL2520S3R3MHT, ERP_ID=12A30021
LH1 LH2 LH3 LH4: library part LOCAL-HOLE, "定位孔"
M1 M2: "Mark点"
R1 R2: "贴片厚膜电阻 12kΩ 1% 0603", 1st Manufacturer=Yageo, 1st PartNumber=RC0603FR-0712KL, 2nd Manufacturer=Bourns, 2nd PartNumber=CR0603-FX-1202ELF, ERP_ID=12A10055
R3 R4 R7 R8 R11 R12: "贴片厚膜电阻 4.7kΩ 1% 0603", 1st Manufacturer=Yageo, 1st PartNumber=RC0603FR-074K7L, 2nd Manufacturer=Bourns, 2nd PartNumber=CR0603-FX-4701ELF, ERP_ID=12A10041
R5 R6 R9 R10 R22: "贴片厚膜电阻 470Ω 1% 0603", 1st Manufacturer=Yageo, 1st PartNumber=RC0603FR-07470RL, 2nd Manufacturer=Bourns, 2nd PartNumber=CR0603-FX-4700ELF, ERP_ID=12A10103
R13 R14 R15 R16 R17 R18 R19 R20: "贴片厚膜电阻 75Ω 1% 0805", 1st Manufacturer=Yageo, 1st PartNumber=RC0805FR-0775RL, 2nd Manufacturer=Bourns, 2nd PartNumber=CR0805-FX-75R0ELF, ERP_ID=12A10083
R21: "贴片厚膜电阻 1kΩ 1% 0603", 1st Manufacturer=Yageo, 1st PartNumber=RC0603FR-071KL, 2nd Manufacturer=Bourns, 2nd PartNumber=CR0603-FX-1001ELF, ERP_ID=12A10007
RN1 RN2: "贴片排阻 49.9Ω 5% 4x0603", 1st Manufacturer=Yageo, 1st PartNumber=YC164-FR-0749R9L, 2nd Manufacturer=Bourns, 2nd PartNumber=CAY16-49R9F4LF, ERP_ID=12A10157
T1 T2: "单口百兆网络隔离变压器", 1st Manufacturer=MNC, 2nd Manufacturer=Pulse, 2nd PartNumber=H1102NL, 1st PartNumber=H1601CE, ERP_ID=12B20002
U1: "2/3端口内置以太网PHY的EtherCAT从站控制器", 1st Manufacturer=创耀, 1st PartNumber=TR8253, ERP_ID=-
U2: "I2C串行EEPROM 16K", 1st Manufacturer=ST, 2nd Manufacturer=复旦微, 2nd PartNumber=FM24C16D-SO-T, 1st PartNumber=M24C16-WMN6TP, ERP_ID=11B20023
U3: "6.5Vin, 3.3Vout, 500mA 同步降压转换器", 1st Manufacturer=南京微盟, 2nd Manufacturer=TI, 2nd PartNumber=LM3671MFX-3.3/NOPB, 1st PartNumber=ME3101A33M5G, ERP_ID=11B20002
X1: library part "25M 20ppm 3225", "贴片无源晶振 25MHz 20ppm 12pF", 1st Manufacturer=TXC, 1st PartNumber=7M-25.000MDHE-T, ERP_ID=12A50002

## Via types
v1: diameter 0.5, hole 0.25, Top Layer to Bottom Layer, tented both sides, 284 vias
v2: diameter 0.6, hole 0.3, Top Layer to Bottom Layer, tented bottom, 9 vias

## Nets (pads, with @x,y where several pads share a name; then routed paths per layer and width w, separated by ;. In a path a pad name is that pad's centre, name@x,y a point inside that pad or via, vN(x,y) a via of type N, cw(c..) or ccw(c..) an arc to the next point about the centre after c; other vN are vias at no path point)
#RESET: C23.1 H1.5 R12.2 U1.49 | length 18.2
  Top Layer w0.15: H1.5 15,5.6 16.8,7.4 20.6,7.4 23.25,10.05 v1(24.6,10.05) 25.95,10.05 26.25,10.35 U1.49
  Bottom Layer w0.15: R12.2 C23.1 C23.1@23.825,11.45 ; R12.2@23.825,10.05 v1(24.6,10.05)
AD0/GPIO0/DIGIO0: H1.12 U1.54 | length 14.2
  Top Layer w0.15: H1.12 22,3 22,5.7 24.1,7.8 26.7,7.8 28.75,9.85 U1.54
AD1/GPIO1/DIGIO1: H1.13 U1.56 | length 12.2
  Top Layer w0.15: H1.13 23,5.6 24.8,7.4 26.9,7.4 28.2,8.7 29.5,8.7 29.75,8.95 U1.56
AD2/GPIO2/DIGIO2: H1.14 U1.57 | length 14.2
  Top Layer w0.15: H1.14 24,3 24,5.5 25.5,7 27.127,7 28.327,8.2 29.7,8.2 30.25,8.75 U1.57
AD3/GPIO3/DIGIO3: H1.15 U1.58 | length 11.4
  Top Layer w0.15: H1.15 25,5.4 26.2,6.6 27.3,6.6 28.423,7.723 29.948,7.723 30.75,8.525 U1.58
AD4/GPIO4/DIGIO4: H1.16 U1.59 | length 13.5
  Top Layer w0.15: H1.16 26,3 26,5.3 26.9,6.2 27.5,6.2 28.55,7.25 30.45,7.25 31.25,8.05 U1.59
AD5/GPIO5/DIGIO5: H1.17 U1.60 | length 10.6
  Top Layer w0.15: H1.17 27,5.1 28.7,6.8 30.8,6.8 31.75,7.75 U1.60
AD6/GPIO6/DIGIO6: H1.18 U1.61 | length 13
  Top Layer w0.15: H1.18 28,3 28,5.5 28.9,6.4 31.2,6.4 32.25,7.45 U1.61
AD7/GPIO7/DIGIO7: H1.19 U1.62 | length 10.2
  Top Layer w0.15: H1.19 29,5.5 29.5,6 31.5,6 32.75,7.25 U1.62
AD8/GPIO8/DIGIO8: H1.22 U1.1 | length 13.8
  Top Layer w0.15: H1.22 32,3 32,5.4 36.2,9.6 36.2,11.8 35.75,12.25 U1.1
AD9/GPIO9/DIGIO9: H1.23 U1.2 | length 11.9
  Top Layer w0.15: H1.23 33,5.3 36.6,8.9 36.6,12.1 35.95,12.75 U1.2
AD10/GPIO10/DIGIO10: H1.24 U1.3 | length 15
  Top Layer w0.15: H1.24 34,3 34,5.2 37,8.2 37,12.7 36.45,13.25 U1.3
AD11/GPIO11/DIGIO11: H1.25 U1.4 | length 13.1
  Top Layer w0.15: U1.4 36.55,13.75 37.375,12.925 37.375,7.475 35,5.1 H1.25
AD12/GPIO12/DIGIO12: H1.26 U1.5 | length 16
  Top Layer w0.15: U1.5 36.65,14.25 37.8,13.1 37.8,6.8 36,5 36,3 H1.26
AD13/GPIO13/DIGIO13: H1.27 U1.6 | length 14
  Top Layer w0.15: U1.6 36.75,14.75 38.2,13.3 38.2,6.2 37,5 H1.27
AD14/GPIO14//DIGIO14: H1.28 U1.7 | length 16.9
  Top Layer w0.15: U1.7 36.85,15.25 38.6,13.5 38.6,5.6 38,5 38,3 H1.28
AD15/GPIO15/DIGIO15: H1.29 U1.8 | length 15
  Top Layer w0.15: U1.8 36.95,15.75 39,13.7 H1.29
ALEHI/EOF: H1.33 U1.10 | length 18.4
  Top Layer w0.15: U1.10 37.15,16.75 39.8,14.1 39.8,6.2 40.5,5.5 41.5,5.5 H1.33
ALELO/SOF: H1.32 U1.9 | length 18.4
  Top Layer w0.15: U1.9 37.05,16.25 39.4,13.9 39.4,5.6 40,5 40,3 H1.32
BE0/LATCH0: H1.34 U1.11 | length 22.4
  Top Layer w0.15: U1.11 37.25,17.25 40.2,14.3 40.2,6.8 40.9,6.1 43.1,6.1 44,5.2 44,3 H1.34
BE1/LATCH1: H1.35 U1.12 | length 21.1
  Top Layer w0.15: U1.12 37.35,17.75 40.6,14.5 40.6,7.5 41.3,6.8 43.6,6.8 45,5.4 H1.35
CLK25_EN: R11.2 U1.45 | length 1.7
  Top Layer w0.15: v1(24.6,13.75) U1.45
  Bottom Layer w0.15: R11.2 23.825,13.75 v1(24.6,13.75)
CS/SCS/WD_STATE: H1.6 U1.50 | length 17.8
  Top Layer w0.15: H1.6 16,3 16,5.5 17.5,7 20.8,7 23.2,9.4 25.9,9.4 26.75,10.25 U1.50
DGND: C1.1 C2.2 C3.2 C4.1 C5.2 C6.2 C7.2 C8.2 C9.2 C10.2 C11.2 C12.2 C13.2 C14.1 C15.1 C16.1 C17.1 C18.1 C19.2 C20.2 C21.2 C22.2 C23.2 C24.2 C25.2 C26.2 C29.2 C30.2 C31.2 C34.1 C35.1 C36.2 C37.2 C38.2 C39.2 C40.2 C41.2 D1.1 D2.1 FB7.2 FB9.2 FB12.2 FB14.2 H1.1 H1.10 H1.11 H1.20 H1.21 H1.30 H1.31 H1.36 H1.37 R1.1 R2.2 R3.1 R4.1 R7.1 R8.1 R11.1 U1.15 U1.65 U2.4 U2.7 U3.2 X1.2 X1.4 | length 20.4
  Top Layer w0.15: v1(11.1,34.5) FB14.2 ; v1(27.5,34.5) FB12.2 ; v1(31.1,34.5) FB9.2 ; D1.1 v1(43.5,13.8) ; v1(43.5,14.6) D2.1 ; v1(47.5,34.5) FB7.2
  Top Layer w0.25: U2.7 C22.2@15.365,20.39 ; v1(17.9,11.9) 17.902,11.902 17.902,12.973 U2.4 ; X1.4 22.175,16.475 v1(22.75,16.475) ; R2.2 v1(24.85,26) ; C4.1 v1(30.05,24.35) ; R1.1 v1(31.45,26) ; U1.15 35.6,19.25 ; C1.1 v1(36.65,24.35) ; R7.1 v1(39.65,26)
  Top Layer w0.3: v1@22.745,17.5 v1(22.75,17.5)
  Bottom Layer w0.25: C31.2 v1(16.8,34.5) ; v1(21.5,11.4) C23.2@22.225,11.4 ; C30.2 v1(23.2,34.5) ; C29.2 v1(24.6,34.5) ; v1(29.25,9.2) C19.2 ; v1(33.25,9.2) C18.1 ; C16.1 v1(35.6,21.1) ; C26.2 v1(36.8,34.5) ; C25.2 v1(43.2,34.5) ; C24.2 v1(44.6,34.5)
  other v1: 30,5.4 31,5.4 42.7,5.4 9.5,7.45 50.5,7.45 42,7.5 13.5,9 16.5,9.5 19.5,9.5 9.5,10.45 50.5,10.45 42,10.5 19.4,11.9 46.5,12.7 47.5,12.7 48.5,12.7 9.5,13.45 50.5,13.45 42,13.5 19,14.6 9.5,16.45 50.5,16.45 42,16.5 19,18 39,18 9.5,19.45 50.5,19.45 42,19.5 15.365,19.6 19.4,19.6 21,19.6 37.45,19.6 22.225,21.4 9.5,22.5 36,22.5 37.45,22.5 42,22.5 50.5,22.5 18.5,25.3 41.45,25.3 9.5,25.5 50.5,25.5 21,26.5 22.5,26.5 9.5,28.5 50.5,28.5 3.5,31.5 6.5,31.5 9.5,31.5 50.5,31.5 3.4,34.5 4,34.5 4.6,34.5 5.2,34.5 5.8,34.5 6.4,34.5 7,34.5 7.6,34.5 8.2,34.5 50.5,34.5 3.4,35.1 4,35.1 4.6,35.1 5.2,35.1 5.8,35.1 6.4,35.1 7,35.1 7.6,35.1 8.2,35.1
  other v2: 28.5,14.5 30,14.5 31.5,14.5 28.5,16 30,16 31.5,16 28.5,17.5 30,17.5 31.5,17.5
EC_ERR: R8.2 R10.2 U1.46 | length 19.9
  Top Layer w0.15: v1(20.3,23) R8.2 ; v1(24.125,12.75) 24.625,13.25 U1.46
  Bottom Layer w0.15: R10.2 v1(20.3,23) 20.3,21.8 18,19.5 18,13.5 18.75,12.75 v1(24.125,12.75)
EC_RUN: R4.2 R6.2 U1.37 | length 8.9
  Top Layer w0.15: R4.2 v1(21.8,23) 22.95,21.85 22.95,20.6 23.7,19.85 23.7,18.3 24.25,17.75 U1.37
  Bottom Layer w0.15: v1(21.8,23) R6.2
EEPROM_CLK: U1.38 U2.6 | length 12.8
  Top Layer w0.15: U2.6 16.635,19.81 17.325,20.5 22.624,20.5 23.4,19.724 23.4,18.1 24.25,17.25 U1.38
EEPROM_SDA: U1.39 U2.5 | length 11.5
  Top Layer w0.15: U2.5 17.905,19.805 18.3,20.2 22.5,20.2 23.1,19.6 23.1,17.9 24.25,16.75 U1.39
IRQ/LATCH_IN: H1.4 U1.48 | length 18.8
  Top Layer w0.15: H1.4 14,3 14,5.7 16.1,7.8 20.4,7.8 23.2,10.6 23.9,10.6 24.4,11.1 24.4,12 24.65,12.25 U1.48
L/A0/CHIP_MODE0: R3.2 R5.2 U1.36 | length 8.5
  Top Layer w0.15: v1(23.25,23) R3.2 23.25,20.725 24,19.975 24,18.5 24.25,18.25 U1.36
  Bottom Layer w0.15: v1(23.25,23) R5.2
L/A1/CHIP_MODE1: R7.2 R9.2 U1.14 | length 9.7
  Top Layer w0.15: U1.14 37.55,18.75 38.25,19.45 R9.2 R7.2
LED_ERR: FB11.2 R10.1 | length 18.9
  Top Layer w0.15: v1(28.9,34.5) FB11.2
  Bottom Layer w0.15: R10.1 20.3,27.6 21.2,28.5 29.3,28.5 29.7,28.9 29.7,33.7 v1(28.9,34.5)
LED_L/A0: FB8.2 R5.1 | length 19
  Top Layer w0.15: v1(32.5,34.5) FB8.2
  Bottom Layer w0.15: R5.1 23.25,27.3 23.85,27.9 29.574,27.9 30.3,28.626 30.3,34.7 30.7,35.1 31.9,35.1 v1(32.5,34.5)
LED_L/A1: FB13.2 R9.1 | length 37.2
  Top Layer w0.15: v1(12.5,34.5) FB13.2 ; R9.1 v1(38.25,26)
  Bottom Layer w0.15: v1(12.5,34.5) 12.5,25.5 13.5,24.5 24.85,24.5 25.55,25.2 37.45,25.2 v1(38.25,26)
LED_RUN: FB6.2 R6.1 | length 37.4
  Top Layer w0.15: v1(49,34.5) FB6.2
  Bottom Layer w0.15: R6.1 21.8,27.55 22.45,28.2 29.45,28.2 30,28.75 30,34.824 30.576,35.4 48.1,35.4 v1(49,34.5)
NetC7_1: C7.1 U1.41 X1.1 | length 7.4
  Top Layer w0.2: C7.1 20.225,16.775 20.15,16.7 21.1,15.75 U1.41
NetC8_1: C8.1 U1.42 X1.3 | length 5.6
  Top Layer w0.2: C8.1 21.775,14.525 X1.3 21.85,14.7 22.4,15.25 U1.42
NetC9_1: C9.1 FB3.1 U1.16 | length 2.6
  Top Layer w0.25: U1.16 v1(34.55,20.375)
  Bottom Layer w0.25: FB3.1 33.775,20.45 C9.1 v1(34.55,20.375)
NetC10_1: C10.1 FB3.2 U1.21 | length 2.7
  Top Layer w0.25: v1@31.75,19.85 U1.21
  Bottom Layer w0.25: v1(31.75,19.85) 31.75,20.15 31.975,20.375 32.075,20.375 C10.1 32.225,20.45 FB3.2
NetC11_1: C11.1 FB4.1 U1.25 | length 2.7
  Top Layer w0.25: v1(29.75,19.85) U1.25
  Bottom Layer w0.25: FB4.1 29.275,20.45 C11.1 29.525,20.375 29.75,20.15 v1(29.75,19.85)
NetC12_1: C12.1 FB4.2 U1.30 | length 2.7
  Top Layer w0.25: v1(27.25,19.85) U1.30
  Bottom Layer w0.25: v1(27.25,19.85) 27.25,20.15 27.475,20.375 C12.1 27.725,20.45 FB4.2
NetC13_1: C13.1 U1.34 | length 2.6
  Top Layer w0.2: v1(24.6,20.3) 24.6,19.4 24.75,19.25 U1.34
  Bottom Layer w0.25: C13.1 v1(24.6,20.3)
NetC19_1: C19.1 U1.55 | length 1.4
  Top Layer w0.25: U1.55 v1(29.25,12.15)
  Bottom Layer w0.25: C19.1 v1(29.25,12.15)
NetC20_1: C20.1 C21.1 U1.47 | length 3.5
  Top Layer w0.25: U1.47 26.132,12.75 26.382,12.5 v1(26.45,12.5)
  Bottom Layer w0.25: v1(26.45,12.5) C20.1 C21.1
NetC24_1: C24.1 C25.1 C26.1 FB5.2 T1.2 T1.7 | length 12.9
  Top Layer w0.25: v1(36.825,31.525) T1.2 ; v1(43.175,31.525) T1.7
  Bottom Layer w0.25: v1(36.825,31.525) 36.825,32.2 C26.1 C25.1 ; v1(43.175,31.525) 43.175,32.2 C25.1 ; FB5.2 C25.1
NetC27_1: C27.1 R13.1 R14.1 R15.1 R16.1
NetC29_1: C29.1 C30.1 C31.1 FB10.2 T2.2 T2.7 | length 12.9
  Top Layer w0.25: v1(16.825,31.525) T2.2 ; v1(23.175,31.525) T2.7
  Bottom Layer w0.25: v1(16.825,31.525) 16.825,32.2 C31.1 C30.1 ; v1(23.175,31.525) 23.175,32.2 C30.1 ; FB10.2 C30.1
NetC32_1: C32.1 R17.1 R18.1 R19.1 R20.1
NetC37_1: C37.1 C38.1 FB15.2 U3.1 U3.3 | length 6.1
  Top Layer w0.2: U3.3 48.45,10.025 C38.1
  Top Layer w0.5: FB15.2 C38.1 ; FB15.2@46.55,10.025 v1(46.55,10.575) U3.1
  Bottom Layer w0.5: v1(46.55,10.575) 46.55,9.975 v1(47.4,9.975)
NetC39_1: C39.1 C40.1 FB16.1 L1.2 U3.4
  other v1: 48.2,17.65 48.9,17.65
NetD1_2: D1.2 R21.1 | length 1.4
  Top Layer w0.15: R21.1 D1.2
NetD2_2: D2.2 R22.1 | length 1.5
  Top Layer w0.15: D2.2 R22.1
NetFB6_1: FB6.1 J1.9 | length 11.4
  Top Layer w0.15: FB6.1 v1(49,37.5)
  GND w0.2: J1.9@46.96,47.29 46.96,45.515 47.85,44.625 47.85,38.65 v1(49,37.5)
NetFB7_1: FB7.1 J1.10 | length 11.7
  Top Layer w0.15: FB7.1 v1(47.5,37.5)
  GND w0.2: J1.10@44.67,47.29 47.5,44.46 v1(47.5,37.5)
NetFB8_1: FB8.1 J1.11 | length 11.7
  Top Layer w0.15: FB8.1 v1(32.5,37.5)
  GND w0.2: v1(32.5,37.5) 32.5,44.36 J1.11
NetFB9_1: FB9.1 J1.12 | length 11.4
  Top Layer w0.15: FB9.1 v1(31.1,37.5)
  GND w0.2: v1(31.1,37.5) 32.15,38.55 32.15,44.525 33.14,45.515 J1.12
NetFB11_1: FB11.1 J2.9 | length 11.4
  Top Layer w0.15: FB11.1 v1(28.9,37.5)
  GND w0.2: J2.9 26.86,45.515 27.85,44.525 27.85,38.55 v1(28.9,37.5)
NetFB12_1: FB12.1 J2.10 | length 11.7
  Top Layer w0.15: FB12.1 v1(27.5,37.5)
  GND w0.2: J2.10 27.5,44.36 v1(27.5,37.5)
NetFB13_1: FB13.1 J2.11 | length 11.7
  Top Layer w0.15: FB13.1 v1(12.5,37.5)
  GND w0.2: v1(12.5,37.5) 12.5,44.36 J2.11
NetFB14_1: FB14.1 J2.12 | length 11.4
  Top Layer w0.15: FB14.1 v1(11.1,37.5)
  GND w0.2: v1(11.1,37.5) 12.15,38.55 12.15,44.525 13.14,45.515 J2.12
NetJ1_4: J1.4 J1.5 R15.2 | length 6.3
  Bottom Layer w0.5: R15.2 40.5,51.069 39.49,52.08 J1.4 39.635,52.255 39.635,53.015 J1.5
NetJ1_7: J1.7 J1.8 R16.2 | length 6.3
  Bottom Layer w0.5: R16.2 42.5,51.04 J1.8 43.485,52.195 43.485,53.076 42.71,53.85 J1.7@42.55,53.85
NetJ2_4: J2.4 J2.5 R19.2 | length 6.3
  Bottom Layer w0.5: R19.2 20.5,51.069 19.49,52.08 J2.4 19.635,52.255 19.635,53.015 J2.5
NetJ2_7: J2.7 J2.8 R20.2 | length 6.3
  Bottom Layer w0.5: R20.2 22.5,51.04 J2.8 23.485,52.195 23.485,53.076 22.71,53.85 J2.7@22.55,53.85
NetL1_1: L1.1 U3.5
NetR1_2: R1.2 U1.22 | length 3.3
  Top Layer w0.15: U1.22 31.25,23.525 R1.2
NetR2_1: R2.1 U1.31 | length 4.4
  Top Layer w0.15: R2.1 24.85,22.55 25.65,21.75 26.375,21.75 26.75,21.375 U1.31
NetR13_2: R13.2 T1.10 | length 3.4
  Top Layer w0.3: v1(42.5,43.85) 43.175,43.175 T1.10
  Bottom Layer w0.25: R13.2@42.5,43.225 v1(42.5,43.85)
NetR14_2: R14.2 T1.15 | length 6.2
  Top Layer w0.3: T1.15 36.825,42.8 37.075,43.05 39.7,43.05 v1(40.5,43.85)
  Bottom Layer w0.25: R14.2@40.5,43.225 v1(40.5,43.85)
NetR17_2: R17.2 T2.10 | length 3.4
  Top Layer w0.3: v1(22.5,43.85) 23.175,43.175 T2.10
  Bottom Layer w0.25: R17.2@22.5,43.225 v1(22.5,43.85)
NetR18_2: R18.2 T2.15 | length 6.2
  Top Layer w0.3: T2.15 16.825,42.8 17.075,43.05 19.7,43.05 v1(20.5,43.85)
  Bottom Layer w0.25: R18.2@20.5,43.225 v1(20.5,43.85)
PE: C27.2 C28.2 C32.2 C33.2 C34.2 C35.2 LH4.0
  other v1: 3.4,40.3 4,40.3 4.6,40.3 5.2,40.3 5.8,40.3 6.4,40.3 7,40.3 7.6,40.3 8.2,40.3 13.9,40.3 26.1,40.3 29.4,40.3 30,40.3 30.6,40.3 33.9,40.3 46.1,40.3 49.2,40.3 49.8,40.3 50.4,40.3 51,40.3 51.6,40.5 1,40.9 2.2,40.9 3.4,40.9 4,40.9 4.6,40.9 5.2,40.9 5.8,40.9 6.4,40.9 7,40.9 7.6,40.9 8.2,40.9 13.9,40.9 26.1,40.9 30,40.9 33.9,40.9 46.1,40.9 51.7,41.1 13.9,41.5 26.1,41.5 33.9,41.5 46.1,41.5 51.7,41.7 1,42.1 13.9,42.1 26.1,42.1 33.9,42.1 46.1,42.1 51.7,42.3 13.9,42.7 26.1,42.7 33.9,42.7 46.1,42.7 51.7,42.9 1,43.3 1,44.5 1,45.7 51.4,46.67 1,46.9 50.6,47.47 51.4,47.47 29.4,47.5 30,47.5 30.6,47.5 1,48.1 30,48.1 1,49.3 1,50.5 1,51.7 1,52.9 51.4,58.2 7.1,59 8.3,59 9.5,59 10.7,59 11.9,59 15.9,59 17.1,59 18.3,59 19.5,59 20.7,59 21.9,59 23.1,59 24.3,59 35.9,59 37.1,59 38.3,59 39.5,59 40.7,59 41.9,59 43.1,59 44.3,59 50.6,59 51.4,59
PHYA_3V3A: C1.2 C3.1 FB1.1 RN1.5 RN1.6 RN1.7 RN1.8 U1.23 | length 17.7
  Top Layer w0.25: v1(30.75,19.85) U1.23 ; RN1.8 RN1.7 RN1.6 RN1.5 C1.2@36.65,25.35 ; C1.2 C1.2@36.65,25.35 ; v1(36.65,26) C1.2@36.65,25.35
  POW w0.5: v1(30.75,19.85) 30.75,20.95 31.5,21.7 31.5,24.5 33,26 v1(36.65,26)
  Bottom Layer w0.25: v1(30.75,19.85) C3.1 FB1.1
PHYB_3V3A: C4.2 C6.1 FB2.1 RN2.5 RN2.6 RN2.7 RN2.8 U1.32 | length 16.4
  Top Layer w0.25: v1(25.55,20.55) U1.32 ; RN2.8 RN2.7 RN2.6 29.975,25.35 C4.2 v1(30.05,26)
  POW w0.5: v1(25.55,20.55) 25,21.1 25,24.525 26.475,26 v1(30.05,26)
  Bottom Layer w0.25: C6.1 FB2.1
R0_N: J1.6 T1.9 | length 19.7
  Top Layer w0.2: v1(43.525,40) 43.575,40.05 44.175,40.05 44.445,40.32 T1.9
  GND w0.2: J1.6 40.52,51.1 39.175,51.1 38.87,50.794 38.87,43.021 39.791,42.1 42.691,42.1 43.375,41.416 v1@43.375,40 ; v1(43.525,40) v1@43.525,40.081
R0_P: J1.3 T1.11 | length 19.6
  Top Layer w0.2: T1.11 41.905,40.345 42.25,40 v1(42.825,40)
  GND w0.2: J1.3 38.47,42.855 39.625,41.7 42.525,41.7 42.975,41.25 v1@42.975,40 ; v1(42.825,40) v1@42.825,40.081
R1_N: J2.6 T2.9 | length 19.7
  Top Layer w0.2: v1(23.525,40) 23.575,40.05 24.175,40.05 24.445,40.32 T2.9
  GND w0.2: J2.6 20.52,51.1 19.175,51.1 18.87,50.794 18.87,43.021 19.791,42.1 22.691,42.1 23.375,41.416 v1@23.375,40 ; v1(23.525,40) v1@23.525,40.081
R1_P: J2.3 T2.11 | length 19.6
  Top Layer w0.2: T2.11 21.905,40.345 22.25,40 v1(22.825,40)
  GND w0.2: J2.3 18.47,42.855 19.625,41.7 22.525,41.7 22.975,41.25 v1@22.975,40 ; v1(22.825,40) v1@22.825,40.081
RD/RD_WR/MOSI/OUTVALID: H1.8 U1.52 | length 16.8
  Top Layer w0.15: H1.8 18,3 18,5.3 18.9,6.2 21.2,6.2 23.6,8.6 26.3,8.6 27.75,10.05 U1.52
RX0_N: CM2.2 RN1.2 U1.19 | length 8.2
  Top Layer w0.2: U1.19 32.75,22 33.65,22.9 RN1.2 v1(33.65,24.35) ; CM2.2 v1(33.45,27.35)
  GND w0.2: v1(33.45,27.35) 33.45,27.283 33.25,27.083 33.25,25.984 33.45,25.784 33.45,24.617 33.65,24.417 v1(33.65,24.35)
RX0_P: CM2.1 RN1.1 U1.20 | length 8.2
  Top Layer w0.2: U1.20 32.25,22.25 33,23 33,23.4 RN1.1 ; CM2.1 v1(32.65,27.35) ; RN1.1@32.85,23.65 v1(32.85,24.35)
  GND w0.2: v1(32.65,27.35) 32.65,27.283 32.85,27.083 32.85,25.819 33.05,25.619 33.05,24.617 32.85,24.417 v1(32.85,24.35)
RX1_N: CM4.2 RN2.2 U1.28 | length 8.3
  Top Layer w0.2: CM4.2 v1(26.85,27.35) ; v1(27.05,24.35) RN2.2 27.05,22.8 28.25,21.6 U1.28
  GND w0.2: v1(26.85,27.35) 26.85,27.283 26.65,27.083 26.65,25.984 26.85,25.784 26.85,24.617 27.05,24.417 v1(27.05,24.35)
RX1_P: CM4.1 RN2.1 U1.29 | length 8.5
  Top Layer w0.2: CM4.1 v1(26.05,27.35) ; RN2.1 26.4,23.4 26.4,22.7 27.75,21.35 U1.29 ; RN2.1@26.25,23.65 v1(26.25,24.35)
  GND w0.2: v1(26.05,27.35) 26.05,27.283 26.25,27.083 26.25,25.819 26.45,25.619 26.45,24.617 26.25,24.417 v1(26.25,24.35)
RX_0_N: CM2.3 T1.8 | length 17.1
  Top Layer w0.2: CM2.3 v1(33.45,29.15) ; v1(43.725,30.9) 44.445,31.62 T1.8
  GND w0.2: v1(33.45,29.15) 33.45,29.217 33.25,29.417 33.25,30.959 34.791,32.5 39.125,32.5 41.475,30.15 42.912,30.15 43.662,30.9 v1(43.725,30.9)
RX_0_P: CM2.4 T1.6 | length 16.5
  Top Layer w0.2: CM2.4 v1(32.65,29.15) ; T1.6 41.905,31.645 v1(42.65,30.9)
  GND w0.2: v1(32.65,29.15) 32.65,29.217 32.85,29.417 32.85,31.125 34.625,32.9 39.291,32.9 41.641,30.55 42.3,30.55 v1(42.65,30.9)
RX_1_N: CM4.3 T2.8 | length 8.3
  Top Layer w0.2: v1(23.725,30.9) 24.445,31.62 T2.8 ; CM4.3 v1(26.85,29.15)
  GND w0.2: v1(23.725,30.9) 23.387,30.562 23.387,30.2 23.587,30 24.484,30 24.934,30.45 26.2,30.45 26.65,30 26.65,29.417 26.85,29.217 v1(26.85,29.15)
RX_1_P: CM4.4 T2.6 | length 8.3
  Top Layer w0.2: T2.6 21.905,31.645 v1(22.65,30.9) ; CM4.4 v1(26.05,29.15)
  GND w0.2: v1(22.65,30.9) 22.987,30.562 22.987,30.034 23.422,29.6 24.65,29.6 25.1,30.05 26.034,30.05 26.25,29.834 26.25,29.417 26.05,29.217 v1(26.05,29.15)
S0: C28.1 J1.13 J1.14
S1: C33.1 J2.13 J2.14
SYNC0: H1.2 U1.43 | length 23.4
  Top Layer w0.15: H1.2 12,3 12,5.9 14.7,8.6 19.9,8.6 20.4,9.1 20.4,10.3 21,10.9 22.3,10.9 23.2,11.8 23.2,14.013 23.937,14.75 U1.43
SYNC1: H1.3 U1.44 | length 19.7
  Top Layer w0.15: H1.3 13,5.8 15.4,8.2 20.151,8.2 20.8,8.849 20.8,10.13 21.17,10.5 22.5,10.5 23.6,11.6 23.6,13.712 24.138,14.25 U1.44
T0_N: J1.2 T1.14 | length 16.1
  Top Layer w0.2: v1(37.175,40) 37.225,40.05 37.825,40.05 38.095,40.32 T1.14
  GND w0.2: v1@37.025,40 37.025,50.807 36.2,51.632 36.2,52.09 36.567,52.457 36.778,52.457 37.125,52.11 J1.2 ; v1(37.175,40) v1@37.175,40.081
T0_P: J1.1 T1.16 | length 16.7
  Top Layer w0.2: T1.16 35.555,40.345 35.9,40 v1(36.475,40)
  GND w0.2: J1.1 36.474,53.846 36.474,52.93 35.8,52.256 35.8,51.466 36.625,50.641 v1@36.625,40 ; v1(36.475,40) v1@36.475,40.081
T1_N: J2.2 T2.14 | length 16.1
  Top Layer w0.2: v1(17.175,40) 17.225,40.05 17.825,40.05 18.095,40.32 T2.14
  GND w0.2: v1@17.025,40 17.025,50.807 16.2,51.632 16.2,52.09 16.567,52.457 16.778,52.457 17.125,52.11 J2.2 ; v1(17.175,40) v1@17.175,40.081
T1_P: J2.1 T2.16 | length 16.7
  Top Layer w0.2: T2.16 15.555,40.345 15.9,40 v1(16.475,40)
  GND w0.2: J2.1 16.474,53.846 16.474,52.93 15.8,52.256 15.8,51.466 16.625,50.641 v1@16.625,40 ; v1(16.475,40) v1@16.475,40.081
TX0_N: CM1.1 RN1.3 U1.18 | length 8.3
  Top Layer w0.2: U1.18 33.25,21.6 34.45,22.8 RN1.3 v1(34.45,24.35) ; CM1.1 v1(34.65,27.35)
  GND w0.2: v1(34.45,24.35) 34.45,24.431 34.625,24.606 34.625,25.784 34.85,26.009 34.85,27.083 34.65,27.283 v1(34.65,27.35)
TX0_P: CM1.2 RN1.4 U1.17 | length 8.5
  Top Layer w0.2: U1.17 33.75,21.35 35.1,22.7 35.1,23.4 RN1.4 ; RN1.4@35.25,23.65 v1(35.25,24.35) ; CM1.2 v1(35.45,27.35)
  GND w0.2: v1(35.25,24.35) 35.25,24.392 35.025,24.617 35.025,25.619 35.25,25.844 35.25,27.083 35.45,27.283 v1(35.45,27.35)
TX1_N: CM3.1 RN2.3 U1.27 | length 8.2
  Top Layer w0.2: v1(27.85,24.35) RN2.3 27.85,22.9 28.75,22 U1.27 ; CM3.1 v1(28.05,27.35)
  GND w0.2: v1(27.85,24.35) 27.85,24.431 28.025,24.606 28.025,25.784 28.25,26.009 28.25,27.083 28.05,27.283 v1(28.05,27.35)
TX1_P: CM3.2 RN2.4 U1.26 | length 8.2
  Top Layer w0.2: RN2.4@28.65,23.65 v1(28.65,24.35) ; RN2.4 28.5,23.4 28.5,23 29.25,22.25 U1.26 ; CM3.2 v1(28.85,27.35)
  GND w0.2: v1(28.65,24.35) 28.65,24.392 28.425,24.617 28.425,25.619 28.65,25.844 28.65,27.083 28.85,27.283 v1(28.85,27.35)
TX_0_N: CM1.4 T1.3 | length 7.4
  Top Layer w0.2: CM1.4 v1(34.65,29.15) ; v1(37.375,30.9) 38.095,31.62 T1.3
  GND w0.2: v1(34.65,29.15) 34.65,29.083 35.108,28.625 36.245,28.625 37.038,29.417 37.038,30.562 v1(37.375,30.9)
TX_0_P: CM1.3 T1.1 | length 5.6
  Top Layer w0.2: CM1.3 v1(35.45,29.15) ; T1.1 35.555,31.645 v1(36.3,30.9)
  GND w0.2: v1(35.45,29.15) 36.079,29.15 36.638,29.709 36.638,30.562 v1(36.3,30.9)
TX_1_N: CM3.4 T2.3 | length 17.5
  Top Layer w0.2: v1(17.375,30.9) 18.095,31.62 T2.3 ; CM3.4 v1(28.05,29.15)
  GND w0.2: v1(17.375,30.9) 17.375,32.031 17.844,32.5 26.709,32.5 28.25,30.959 28.25,29.417 28.05,29.217 v1(28.05,29.15)
TX_1_P: CM3.3 T2.1 | length 19.4
  Top Layer w0.2: T2.1 15.555,31.645 v1(16.3,30.9) ; CM3.3 v1(28.85,29.15)
  GND w0.2: v1(16.3,30.9) 16.3,32.031 17.169,32.9 26.875,32.9 28.65,31.125 28.65,29.417 28.85,29.217 v1(28.85,29.15)
VCC_3V3: C2.1 C5.1 C14.2 C15.2 C16.2 C17.2 C18.2 C22.1 C41.1 FB1.2 FB2.2 FB5.1 FB10.1 FB16.2 R12.1 R22.2 U1.13 U1.24 U1.33 U1.35 U1.40 U1.63 U2.8 | length 24.7
  Top Layer w0.15: R22.2 43.575,19.9 v1(45.9,19.9)
  Top Layer w0.2: v1(24.6,16.25) U1.40 ; v1(24.6,18.75) U1.35 26.15,18.75 26.3,18.9 26.3,19.575 26.125,19.75 U1.33 ; U1.24 30.25,22.033 30.5,22.283 v1(30.5,22.3) ; U1.13 v1(35.6,18.25)
  Top Layer w0.25: U2.8 C22.1@14.095,20.33 ; U1.63 v1(33.25,12.15)
  Bottom Layer w0.25: v1(21.5,10) R12.1@22.225,10 ; v1(24.6,16.25) 23.925,16.25 C17.2 C14.2 C15.2 23.925,18.75 v1(24.6,18.75) ; FB10.1 v1(26,34.5) ; v1(26,22.3) FB2.2@26,22.825 ; FB2.2@26.075,23.075 FB2.2 27.65,23.075 C5.1 ; v1(30.5,22.3) 30.5,22.825 FB1.2 32.15,23.075 C2.1 ; C18.2 v1(33.25,12.15) ; v1(35.6,18.25) C16.2 ; FB5.1 v1(46,34.5)
  other v1: 45.9,18.5 45.9,19.2 14.095,19.6
VCC_5V: C36.1 FB15.1 H1.38 H1.39 H1.40 R21.2 | length 3.6
  Top Layer w0.15: R21.2 FB15.1
  Bottom Layer w0.5: v1(46.225,7.5) v1(46.775,7.5)
WAIT_ACK/MISO/OE_EXT: H1.9 U1.53 | length 13.9
  Top Layer w0.15: H1.9 19,5.25 19.55,5.8 21.4,5.8 23.8,8.2 26.5,8.2 28.25,9.95 U1.53
WR/ENB/SCK/WD_TRIG: H1.7 U1.51 | length 14.9
  Top Layer w0.15: H1.7 17,5.4 18.2,6.6 21,6.6 23.4,9 26.1,9 27.25,10.15 U1.51
pads on no net: J1. J2. LH1.0 LH2.0 LH3.0 M1.0 M2.0 T1.4 T1.5 T1.12 T1.13 T2.4 T2.5 T2.12 T2.13 U1.64 U2.1 U2.2 U2.3

## Polygon pours and split planes (outlines as drawn)
DGND on GND "DGND_L02_P007" (solid, remove dead copper, pour order 7): 50.5,0.5 51,1 51,35 50.5,35.5 2.5,35.5 2,35 2,31 2.5,30.5 8.5,30.5 9,30 9,1 9.5,0.5
PE on POW "PE_L03_P006" (solid, remove dead copper, pour order 6): 0.5,59.5 0.5,40.5 1,40 51.5,40 52.025,40.525 52.025,59.5
VCC_3V3 on POW "VCC_3V3_L03_P001" (solid, remove dead copper, pour order 1): 9.5,0.5 9,1 9,35 9.5,35.5 50.5,35.5 51,35 51,1 50.5,0.5
DGND on Bottom Layer "DGND_L04_P008" (solid, remove dead copper, pour order 8): 50.5,0.5 51,1 51,35.7 50.5,36.2 2.5,36.2 2,35.7 2,31 2.5,30.5 8.5,30.5 9,30 9,1 9.5,0.5
PE on Bottom Layer "PE_L04_P002" (solid, remove dead copper, pour order 2): 0.5,59.5 0.5,40 1,39.5 51.5,39.5 52.025,40.025 52.025,59.5
DGND on Top Layer "DGND_L01_P009" (solid, remove dead copper, pour order 9): 50.5,0.5 51,1 51,35 50.5,35.5 2.5,35.5 2,35 2,31 2.5,30.5 8.5,30.5 9,30 9,1 9.5,0.5
PE on Top Layer "PE_L01_P005" (solid, remove dead copper, pour order 5): 0.5,59.5 0.5,40.5 1,40 51.5,40 52.025,40.525 52.025,59.5
S0 on Top Layer "S0_L01_P004" (solid, remove dead copper, pour order 4): 31,54.1 52,54.1 52,49 31,49
S1 on Top Layer "S1_L01_P003" (solid, remove dead copper, pour order 3): 29,54.1 8,54.1 8,49 29,49

## Other copper
Top Layer:
  pour cut-out: 58,51 cw(c58,52) 57,52 cw(c58,52) 58,53 cw(c58,52) 59,52 cw(c58,52)
  pour cut-out: 7,5 cw(c7,6) 6,6 cw(c7,6) 7,7 cw(c7,6) 8,6 cw(c7,6)
  region net DGND: 22.325,17.875 22.725,17.875 22.95,17.65 22.95,17.45 22.75,17.25 22.45,17.25 22.325,17.375
  region net VCC_3V3: 47.075,20.425 45.75,20.425 45.5,20.175 45.5,18.225 45.75,17.975 47.075,17.975
  region net NetL1_1: 46.875,13.575 46.975,13.675 46.975,17.5 45.8,17.5 45.7,17.4 45.7,15.2 45.7,13.675 45.8,13.575
  region net NetC39_1: 48.025,13.575 47.925,13.675 47.925,19.025 49.1,19.025 49.2,18.925 49.2,13.675 49.1,13.575
  region net VCC_5V: 47.025,8.775 47.025,7.1 47.375,6.75 48.875,6.75 49.6,6.025 49.6,2 49,1.4 47,1.4 47,2.6 48,2.6 48.4,3 48.4,5.35 48,5.75 46.75,5.75 45.975,6.525 45.975,8.775
  text "E" at 59.266,28 h3 r90
Bottom Layer:
  rectangle net DGND: 3,34 8.5,36.2
  pour cut-out: 58,51 ccw(c58,52) 59,52 ccw(c58,52) 58,53 ccw(c58,52) 57,52 ccw(c58,52)
  pour cut-out: 7,5 ccw(c7,6) 8,6 ccw(c7,6) 7,7 ccw(c7,6) 6,6 ccw(c7,6)
  region net NetC32_1: 16.875,46.975 23.225,46.975 23.25,47 23.25,44.525 19.75,44.525 19.75,45.4 19.275,45.875 16.875,45.875
  region net NetC27_1: 36.875,46.975 43.225,46.975 43.25,47 43.25,44.525 39.75,44.525 39.75,45.4 39.275,45.875 36.875,45.875
  region net NetC39_1: 49.425,16.625 49.525,16.725 49.525,17.9 49.425,18 46.975,18 46.875,17.9 46.875,16.725 46.975,16.625
  region net VCC_5V: 45.975,7.5 47.025,7.5 47.025,9.025 45.975,9.025

## Silkscreen, mask and mechanical layers (free items; w line width, h text height)
Top Overlay:
  text "OUT" at 25.75,44.5 h1.2
  text "IN" at 45.75,44.5 h1.2
  text "Rev 1.0" at 4.032,42.254 h2 r90
  text "EVB-PDI" at 4.197,28 h3 r90
  text "3.3V" at 45.3,14.95 h1.2 r90
  text "TR8253" at 4.184,13 h3 r90
  text "5V" at 45.3,10.95 h1.2 r90
Top Solder:
  text "E" at 59.266,28 h3 r90
Mechanical 1:
  the board outline again, w0.2
Mechanical 15:
  circle w0.2: c13,2 r0.5
  circle w0.2: c13,4 r0.5
  circle w0.2: c11,2 r0.5
  circle w0.2: c49,4 r0.5
  circle w0.2: c49,2 r0.5
  circle w0.2: c11,4 r0.5
  circle w0.2: c56.5,56.5 r1.6
  circle w0.2: c56.5,3.5 r1.6
  circle w0.2: c3.5,3.5 r1.6
  circle w0.2: c3.5,56.5 r1.6
  lines w0.2: 0,0 0,60 60,60 60,0 0,0